# EAGLE board MicroMod-Ethernet-Function-Board-Panel (EAGLE 9.6.2), part 1 of 3
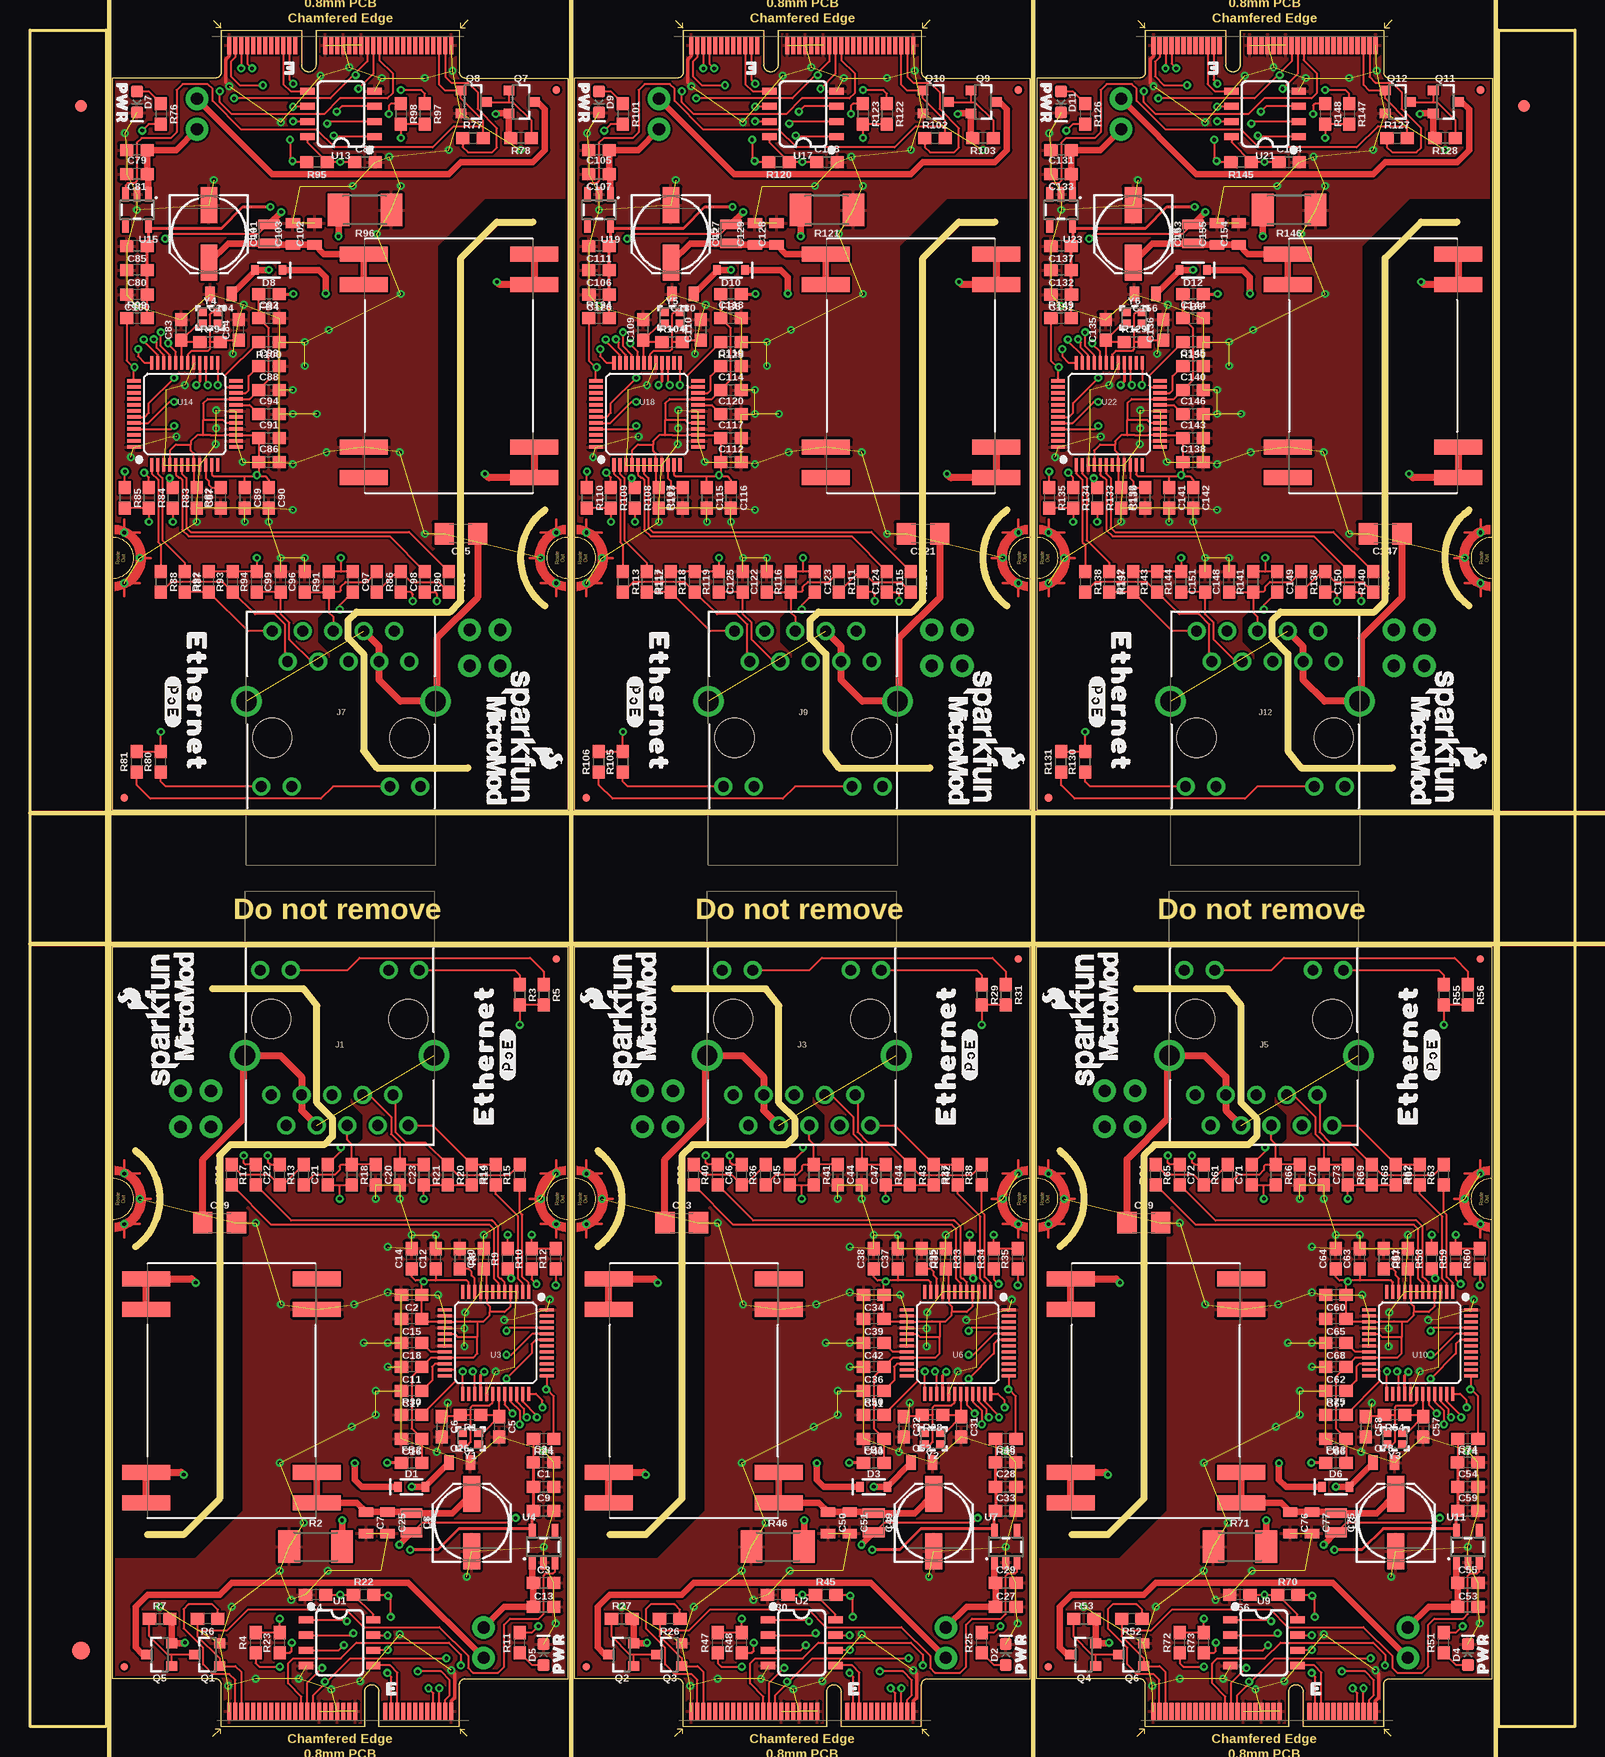
[diagram p0: board, top side]
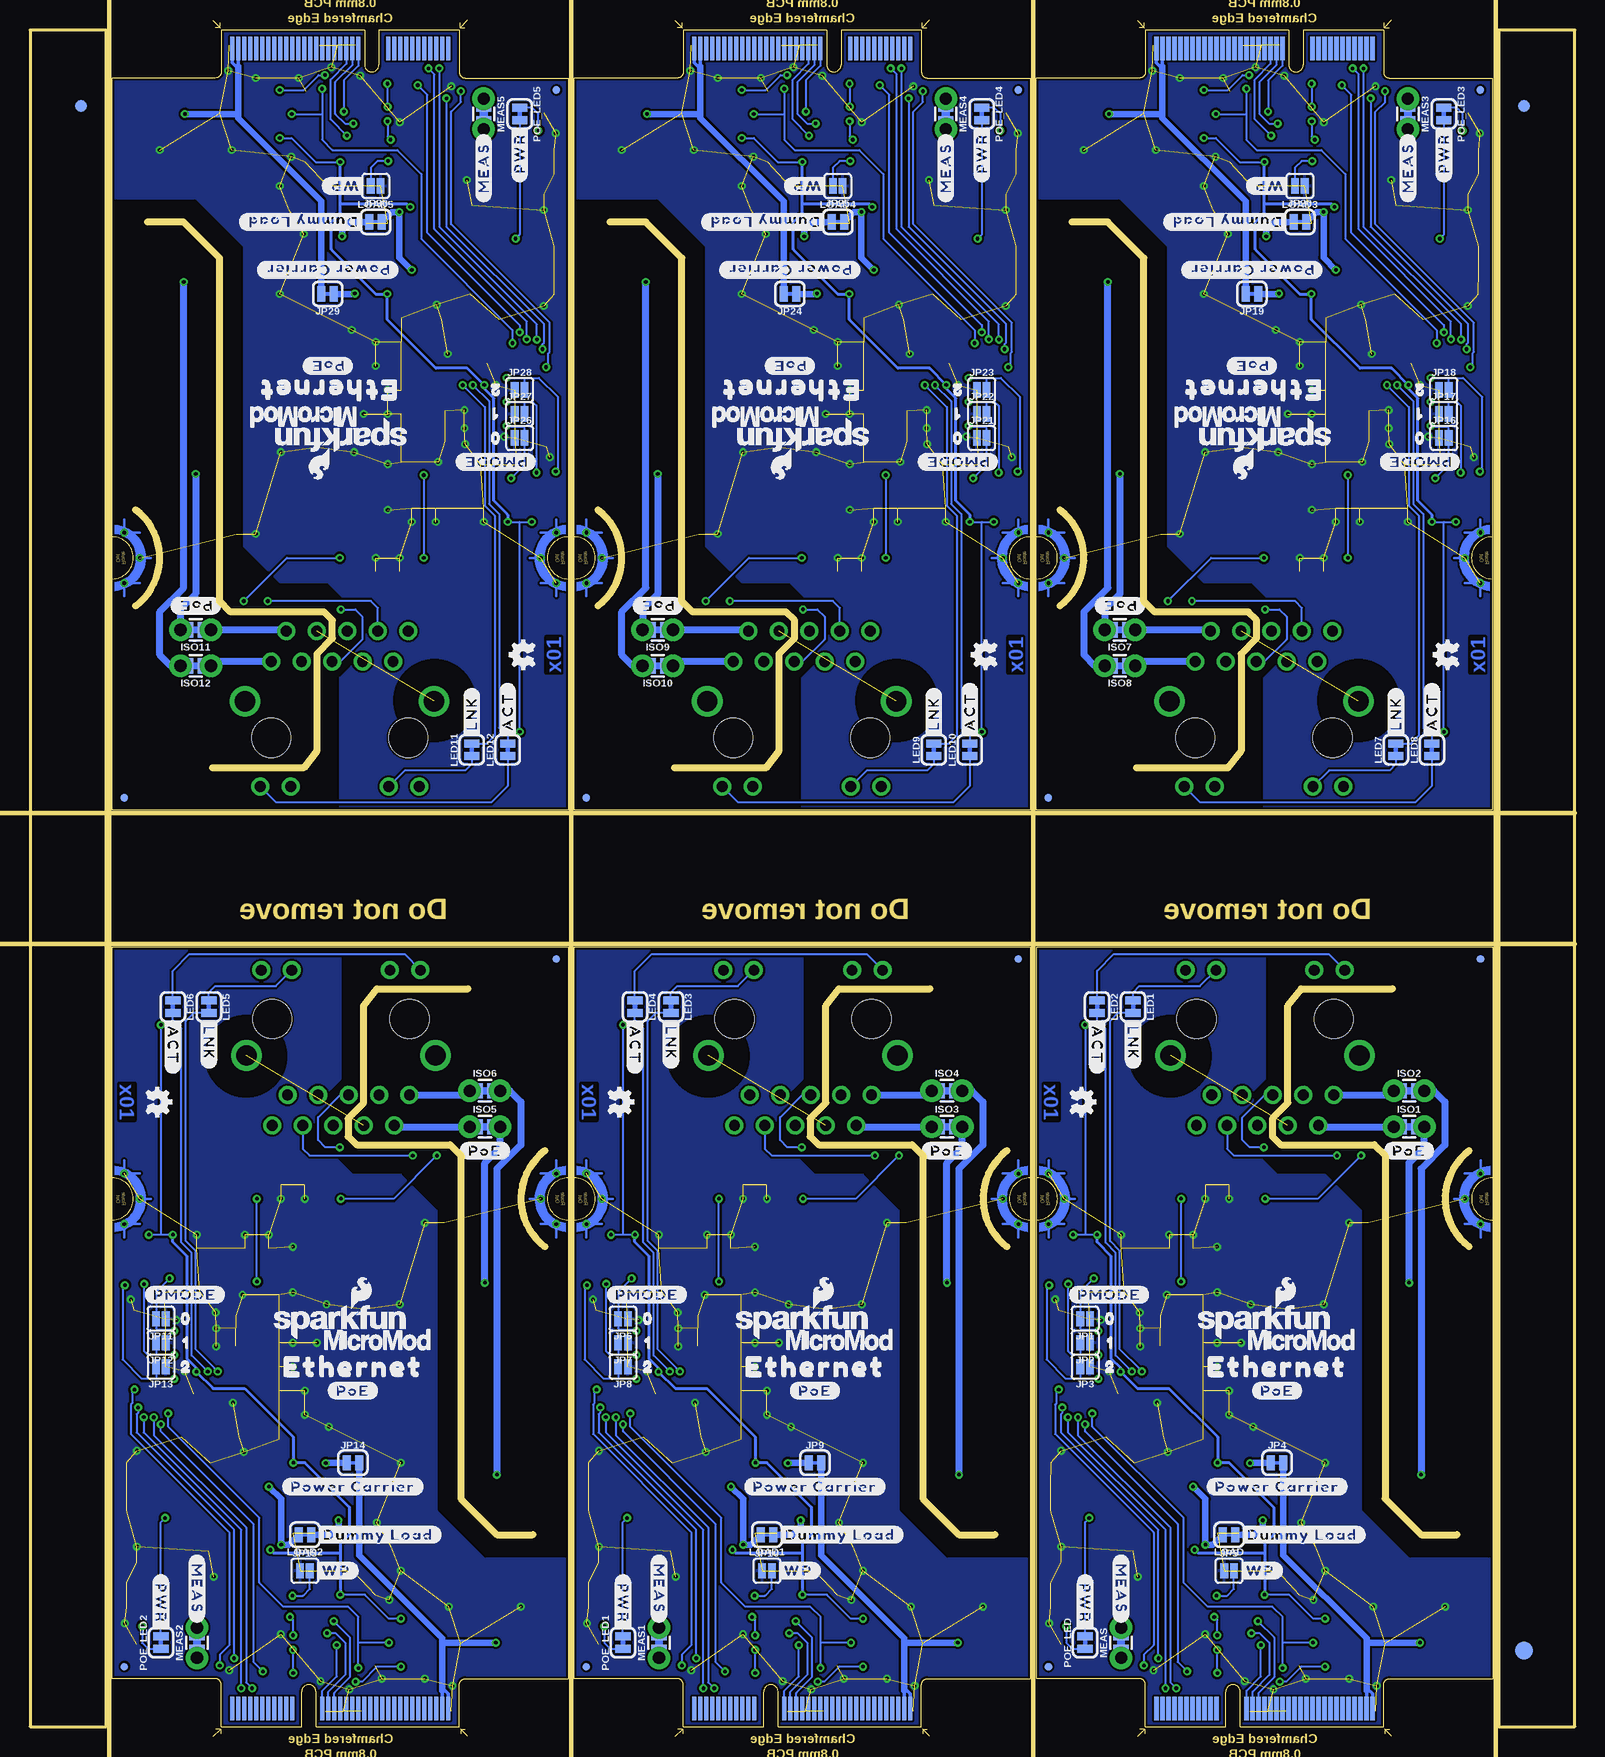
[diagram p1: board, bottom side, seen from below]

Size 128.73 x 141.43 mm. Coordinates in mm from the lower left corner, seen from the top.
Outline: 35.78,0 29.08,0 29.08,2.9 arc180 27.88,2.9 27.88,0 15.93,0 15.93,3.5 arc90 15.46,4 6.86,4 6.86,65 44.86,65 44.86,4 36.26,4 arc90 35.78,3.5 35.78,0
Outline: 74.29,0 67.59,0 67.59,2.9 arc180 66.39,2.9 66.39,0 54.44,0 54.44,3.5 arc90 53.97,4 45.37,4 45.37,65 83.37,65 83.37,4 74.77,4 arc90 74.29,3.5 74.29,0
Outline: 112.8,0 106.1,0 106.1,2.9 arc180 104.9,2.9 104.9,0 92.95,0 92.95,3.5 arc90 92.47,4 83.87,4 83.87,65 121.87,65 121.87,4 113.27,4 arc90 112.8,3.5 112.8,0
Outline: 15.93,141.43 22.63,141.43 22.63,138.53 arc180 23.84,138.53 23.84,141.43 35.78,141.43 35.78,137.93 arc90 36.26,137.43 44.86,137.43 44.86,76.43 6.86,76.43 6.86,137.43 15.46,137.43 arc90 15.93,137.93 15.93,141.43
Outline: 54.44,141.43 61.14,141.43 61.14,138.53 arc180 62.34,138.53 62.34,141.43 74.29,141.43 74.29,137.93 arc90 74.77,137.43 83.37,137.43 83.37,76.43 45.37,76.43 45.37,137.43 53.97,137.43 arc90 54.44,137.93 54.44,141.43
Outline: 92.95,141.43 99.65,141.43 99.65,138.53 arc180 100.85,138.53 100.85,141.43 112.8,141.43 112.8,137.93 arc90 113.28,137.43 121.88,137.43 121.88,76.43 83.88,76.43 83.88,137.43 92.48,137.43 arc90 92.95,137.93 92.95,141.43
Outline: 122.38,141.43 128.73,141.43 128.73,0 122.38,0 122.38,141.43
Outline: 0,141.43 6.35,141.43 6.35,0 0,0 0,141.43
Copper layers (1*16): Top 0.035mm / dielectric 1.5mm / Bottom 0.035mm
Design rules "MicroMod-Ethernet-Function-Board": minimum track width 7mil, minimum drill 12mil, track to track 7mil, track to pad 7mil, pad to pad 7mil, via to via 7mil, smd to smd 7mil, copper to edge 7mil, drill to drill 7mil, minimum pad ring 7mil, minimum via ring 7mil, stop-mask expansion 4mil, vias tented up to drill 25mil, thermal gap 10mil
Net classes: 0 default: width 0 mm, drill 0 mm
tRestrict: area 30.6,52.8 to 36.8,59; area 69.1,52.8 to 75.4,59; area 107.6,52.8 to 113.9,59; area 14.9,82.4 to 21.1,88.7; area 53.4,82.4 to 59.7,88.7; area 91.9,82.4 to 98.2,88.7
bRestrict: area 30.6,52.8 to 36.8,59; area 69.1,52.8 to 75.4,59; area 107.6,52.8 to 113.9,59; area 14.9,82.4 to 21.1,88.7; area 53.4,82.4 to 59.7,88.7; area 91.9,82.4 to 98.2,88.7
Milling: 78 lines

## Footprints (pad centres in the part's own frame; a part is rotated, then mirrored left to right if it is on the bottom)
0603 = smd 1.1 x 1: 1 -0.85,0; 2 0.85,0
0805 = smd 0.8 x 1.2: 1 -0.9,0; 2 0.9,0
PANASONIC_D = smd 3 x 1.4: + 2.4,0; - -2.4,0
1206 = smd 1.6 x 1.8: 1 -1.4,0; 2 1.4,0
SOD-323 = smd 0.63 x 0.83: A 1.15,0; C -1.15,0
LED-0603 = smd 1 x 1: A -0.877,0; C 0.877,0
FIDUCIAL-1X2 = smd 1 x 1: 1 0,0
FIDUCIAL-1.5X3 = smd 1.5 x 1.5: 1 0,0
FIDUCIAL-MICRO = smd 0.635 x 0.635: 1 0,0
COMBO-JUMPER_2_NC_TRACE = smd 0.635 x 1.27: 1 -0.508,0; 2 0.508,0 | drill 1.016 pad 1.88: 3 -1.27,0; 4 1.27,0
MAGJACK-STR_LED = drill 0.9 pad 1.5: 1 -5.715,8.89; 2 -4.445,6.35; 3 -3.175,8.89; 4 -1.905,6.35; 5 -0.635,8.89; 6 0.635,6.35; 7 1.905,8.89; 8 3.175,6.35; 9 4.445,8.89; 10 5.715,6.35; 11 -6.63,-4.06; 12 -4.09,-4.06; 13 4.09,-4.06; 14 6.63,-4.06 | drill 1.7 pad 2.4: S1 -7.875,3.05; S2 7.875,3.05 | hole 3.25: -5.715,0; 5.715,0
M.2-CARD-E-22_FUNCTION_STANDARD = smd 0.35 x 1.45: 1 9.25,1.275; 3 8.75,1.275; 5 8.25,1.275; 7 7.75,1.275; 9 7.25,1.275; 11 6.75,1.275; 13 6.25,1.275; 15 5.75,1.275; 17 5.25,1.275; 19 4.75,1.275; 21 4.25,1.275; 23 3.75,1.275; 33 1.25,1.275; 35 0.75,1.275; 37 0.25,1.275; 39 -0.25,1.275; 41 -0.75,1.275; 43 -1.25,1.275; 45 -1.75,1.275; 47 -2.25,1.275; 49 -2.75,1.275; 51 -3.25,1.275; 53 -3.75,1.275; 55 -4.25,1.275; 57 -4.75,1.275; 59 -5.25,1.275; 61 -5.75,1.275; 63 -6.25,1.275; 65 -6.75,1.275; 67 -7.25,1.275; 69 -7.75,1.275; 71 -8.25,1.275; 73 -8.75,1.275; 75 -9.25,1.275 | smd 0.35 x 1.95 bottom: 2 9,1.525; 4 8.5,1.525; 6 8,1.525; 8 7.5,1.525; 10 7,1.525; 12 6.5,1.525; 14 6,1.525; 16 5.5,1.525; 18 5,1.525; 20 4.5,1.525; 22 4,1.525; 32 1.5,1.525; 34 1,1.525; 36 0.5,1.525; 38 0,1.525; 40 -0.5,1.525; 42 -1,1.525; 44 -1.5,1.525; 46 -2,1.525; 48 -2.5,1.525; 50 -3,1.525; 52 -3.5,1.525; 54 -4,1.525; 56 -4.5,1.525; 58 -5,1.525; 60 -5.5,1.525; 62 -6,1.525; 64 -6.5,1.525; 66 -7,1.525; 68 -7.5,1.525; 70 -8,1.525; 72 -8.5,1.525; 74 -9,1.525 | drill 0.305 pad 0.61: GND1 -18,41.9; GND2 -16.7,44; GND3 -18,46.1; GND4 18,41.9; GND5 16.7,44; GND6 18,46.1
SMT-JUMPER_2_NO_SILK = smd 0.635 x 1.27: 1 -0.406,0; 2 0.406,0
SMT-JUMPER_2_NC_TRACE_SILK = smd 0.66 x 1.27: 1 -0.521,0; 2 0.521,0
0805-WIDE = smd 0.8 x 1.8: 1 -0.8,0; 2 0.8,0
SOT23-3 = smd 0.8 x 0.9: 1 -0.95,-1; 2 0.95,-1; 3 0,1.1
2010 = smd 1.8 x 2.7: 1 -2.2,0; 2 2.2,0
SO08 = smd 0.6 x 1.2: 1 -1.905,-2.8; 2 -0.635,-2.8; 3 0.635,-2.8; 4 1.905,-2.8; 5 1.905,2.8; 6 0.635,2.8; 7 -0.635,2.8; 8 -1.905,2.8
LQFP-48 = smd 0.254 x 1.143: 1 -2.75,-4.25; 2 -2.25,-4.25; 3 -1.75,-4.25; 4 -1.25,-4.25; 5 -0.75,-4.25; 6 -0.25,-4.25; 7 0.25,-4.25; 8 0.75,-4.25; 9 1.25,-4.25; 10 1.75,-4.25; 11 2.25,-4.25; 12 2.75,-4.25; 25 2.75,4.25; 26 2.25,4.25; 27 1.75,4.25; 28 1.25,4.25; 29 0.75,4.25; 30 0.25,4.25; 31 -0.25,4.25; 32 -0.75,4.25; 33 -1.25,4.25; 34 -1.75,4.25; 35 -2.25,4.25; 36 -2.75,4.25 | smd 1.143 x 0.254: 13 4.25,-2.75; 14 4.25,-2.25; 15 4.25,-1.75; 16 4.25,-1.25; 17 4.25,-0.75; 18 4.25,-0.25; 19 4.25,0.25; 20 4.25,0.75; 21 4.25,1.25; 22 4.25,1.75; 23 4.25,2.25; 24 4.25,2.75; 37 -4.25,2.75; 38 -4.25,2.25; 39 -4.25,1.75; 40 -4.25,1.25; 41 -4.25,0.75; 42 -4.25,0.25; 43 -4.25,-0.25; 44 -4.25,-0.75; 45 -4.25,-1.25; 46 -4.25,-1.75; 47 -4.25,-2.25; 48 -4.25,-2.75
SOT23-5 = smd 0.55 x 1.2: 1 -0.95,-1.3; 2 0,-1.3; 3 0.95,-1.3; 4 0.95,1.3; 5 -0.95,1.3
DP990X = smd 1.25 x 4: 1 -9.33,-7.1; 2 -6.79,-7.1; 3 6.79,-7.1; 4 9.33,-7.1; 5 9.33,7.1; 6 6.79,7.1; 7 -6.79,7.1; 8 -9.33,7.1
CRYSTAL-SMD-2.0X1.6MM = smd 0.75 x 0.7: 1 -0.675,-0.5; 2 0.675,-0.5; 3 0.675,0.5; 4 -0.675,0.5

## Placement (x,y rotation side)
C1  0.1uF  [0603]  42.81,20 0 top
C2  0.1uF  [0603]  31.81,36 180 top
C3  0.1uF  [0603]  42.81,12 0 top
C4  0.1uF  [0603]  23.81,11 180 top
C5  10pF  [0603]  39.11,25 270 top
C6  10pF  [0603]  34.31,25 270 top
C7  10uF  [0805]  28.01,17 270 top
C8  100uF  [PANASONIC_D]  36.81,17 90 top
C9  10uF  [0603]  42.81,18 0 top
C10  0.1uF  [0603]  37.81,39 90 top
C11  0.1uF  [0603]  31.81,30 180 top
C12  0.1uF  [0603]  33.81,39 90 top
C13  1.0uF  [0603]  42.81,10 0 top
C14  0.1uF  [0603]  31.81,39 90 top
C15  0.1uF  [0603]  31.81,34 180 top
C16  10uF  [0603]  31.81,24 180 top
C17  10nF  [0603]  31.81,28 180 top
C18  4.7uF  [0603]  31.81,32 180 top
C19  1nF  [1206]  15.81,42 0 top
C20  10nF  [0603]  28.81,46 270 top
C21  6.8nF  [0603]  24.81,46 90 top
C22  6.8nF  [0603]  20.81,46 90 top
C23  22nF  [0603]  30.81,46 270 top
C24  1.0uF  [0603]  42.8,22.05 0 top
C25  10uF  [0805]  29.81,17 270 top
C26  10uF  [0805]  35.81,22 0 top
C27  1.0uF  [0603]  81.32,10 0 top
C28  0.1uF  [0603]  81.32,20 0 top
C29  0.1uF  [0603]  81.32,12 0 top
C30  0.1uF  [0603]  62.32,11 180 top
C31  10pF  [0603]  77.62,25 270 top
C32  10pF  [0603]  72.82,25 270 top
C33  10uF  [0603]  81.32,18 0 top
C34  0.1uF  [0603]  70.32,36 180 top
C35  0.1uF  [0603]  76.32,39 90 top
C36  0.1uF  [0603]  70.32,30 180 top
C37  0.1uF  [0603]  72.32,39 90 top
C38  0.1uF  [0603]  70.32,39 90 top
C39  0.1uF  [0603]  70.32,34 180 top
C40  10uF  [0603]  70.32,24 180 top
C41  10nF  [0603]  70.32,28 180 top
C42  4.7uF  [0603]  70.32,32 180 top
C43  1nF  [1206]  54.32,42 0 top
C44  10nF  [0603]  67.32,46 270 top
C45  6.8nF  [0603]  63.32,46 90 top
C46  6.8nF  [0603]  59.32,46 90 top
C47  22nF  [0603]  69.32,46 270 top
C48  1.0uF  [0603]  81.31,22.05 0 top
C49  100uF  [PANASONIC_D]  75.32,17 90 top
C50  10uF  [0805]  66.52,17 270 top
C51  10uF  [0805]  68.32,17 270 top
C52  10uF  [0805]  74.32,22 0 top
C53  1.0uF  [0603]  119.82,10 0 top
C54  0.1uF  [0603]  119.82,20 0 top
C55  0.1uF  [0603]  119.82,12 0 top
C56  0.1uF  [0603]  100.82,11 180 top
C57  10pF  [0603]  116.12,25 270 top
C58  10pF  [0603]  111.32,25 270 top
C59  10uF  [0603]  119.82,18 0 top
C60  0.1uF  [0603]  108.82,36 180 top
C61  0.1uF  [0603]  114.82,39 90 top
C62  0.1uF  [0603]  108.82,30 180 top
C63  0.1uF  [0603]  110.82,39 90 top
C64  0.1uF  [0603]  108.82,39 90 top
C65  0.1uF  [0603]  108.82,34 180 top
C66  10uF  [0603]  108.82,24 180 top
C67  10nF  [0603]  108.82,28 180 top
C68  4.7uF  [0603]  108.82,32 180 top
C69  1nF  [1206]  92.82,42 0 top
C70  10nF  [0603]  105.82,46 270 top
C71  6.8nF  [0603]  101.82,46 90 top
C72  6.8nF  [0603]  97.82,46 90 top
C73  22nF  [0603]  107.82,46 270 top
C74  1.0uF  [0603]  119.81,22.05 0 top
C75  100uF  [PANASONIC_D]  113.82,17 90 top
C76  10uF  [0805]  105.02,17 270 top
C77  10uF  [0805]  106.82,17 270 top
C78  10uF  [0805]  112.82,22 0 top
C79  1.0uF  [0603]  8.91,131.43 180 top
C80  0.1uF  [0603]  8.91,121.43 180 top
C81  0.1uF  [0603]  8.91,129.43 180 top
C82  0.1uF  [0603]  27.91,130.43 0 top
C83  10pF  [0603]  12.61,116.43 90 top
C84  10pF  [0603]  17.41,116.43 90 top
C85  10uF  [0603]  8.91,123.43 180 top
C86  0.1uF  [0603]  19.91,105.43 0 top
C87  0.1uF  [0603]  13.91,102.43 270 top
C88  0.1uF  [0603]  19.91,111.43 0 top
C89  0.1uF  [0603]  17.91,102.43 270 top
C90  0.1uF  [0603]  19.91,102.43 270 top
C91  0.1uF  [0603]  19.91,107.43 0 top
C92  10uF  [0603]  19.91,117.43 0 top
C93  10nF  [0603]  19.91,113.43 0 top
C94  4.7uF  [0603]  19.91,109.43 0 top
C95  1nF  [1206]  35.91,99.43 180 top
C96  10nF  [0603]  22.91,95.43 90 top
C97  6.8nF  [0603]  26.91,95.43 270 top
C98  6.8nF  [0603]  30.91,95.43 270 top
C99  22nF  [0603]  20.91,95.43 90 top
C100  1.0uF  [0603]  8.92,119.38 180 top
C101  100uF  [PANASONIC_D]  14.91,124.43 270 top
C102  10uF  [0805]  23.71,124.43 90 top
C103  10uF  [0805]  21.91,124.43 90 top
C104  10uF  [0805]  15.91,119.43 180 top
C105  1.0uF  [0603]  47.42,131.43 180 top
C106  0.1uF  [0603]  47.42,121.43 180 top
C107  0.1uF  [0603]  47.42,129.43 180 top
C108  0.1uF  [0603]  66.42,130.43 0 top
C109  10pF  [0603]  51.12,116.43 90 top
C110  10pF  [0603]  55.92,116.43 90 top
C111  10uF  [0603]  47.42,123.43 180 top
C112  0.1uF  [0603]  58.42,105.43 0 top
C113  0.1uF  [0603]  52.42,102.43 270 top
C114  0.1uF  [0603]  58.42,111.43 0 top
C115  0.1uF  [0603]  56.42,102.43 270 top
C116  0.1uF  [0603]  58.42,102.43 270 top
C117  0.1uF  [0603]  58.42,107.43 0 top
C118  10uF  [0603]  58.42,117.43 0 top
C119  10nF  [0603]  58.42,113.43 0 top
C120  4.7uF  [0603]  58.42,109.43 0 top
C121  1nF  [1206]  74.42,99.43 180 top
C122  10nF  [0603]  61.42,95.43 90 top
C123  6.8nF  [0603]  65.42,95.43 270 top
C124  6.8nF  [0603]  69.42,95.43 270 top
C125  22nF  [0603]  59.42,95.43 90 top
C126  1.0uF  [0603]  47.43,119.38 180 top
C127  100uF  [PANASONIC_D]  53.42,124.43 270 top
C128  10uF  [0805]  62.22,124.43 90 top
C129  10uF  [0805]  60.42,124.43 90 top
C130  10uF  [0805]  54.42,119.43 180 top
C131  1.0uF  [0603]  85.93,131.43 180 top
C132  0.1uF  [0603]  85.93,121.43 180 top
C133  0.1uF  [0603]  85.93,129.43 180 top
C134  0.1uF  [0603]  104.93,130.43 0 top
C135  10pF  [0603]  89.63,116.43 90 top
C136  10pF  [0603]  94.43,116.43 90 top
C137  10uF  [0603]  85.93,123.43 180 top
C138  0.1uF  [0603]  96.93,105.43 0 top
C139  0.1uF  [0603]  90.93,102.43 270 top
C140  0.1uF  [0603]  96.93,111.43 0 top
C141  0.1uF  [0603]  94.93,102.43 270 top
C142  0.1uF  [0603]  96.93,102.43 270 top
C143  0.1uF  [0603]  96.93,107.43 0 top
C144  10uF  [0603]  96.93,117.43 0 top
C145  10nF  [0603]  96.93,113.43 0 top
C146  4.7uF  [0603]  96.93,109.43 0 top
C147  1nF  [1206]  112.93,99.43 180 top
C148  10nF  [0603]  99.93,95.43 90 top
C149  6.8nF  [0603]  103.93,95.43 270 top
C150  6.8nF  [0603]  107.93,95.43 270 top
C151  22nF  [0603]  97.93,95.43 90 top
C152  1.0uF  [0603]  85.94,119.38 180 top
C153  100uF  [PANASONIC_D]  91.93,124.43 270 top
C154  10uF  [0805]  100.73,124.43 90 top
C155  10uF  [0805]  98.93,124.43 90 top
C156  10uF  [0805]  92.93,119.43 180 top
D1  3A/10V/280mV  [SOD-323]  31.81,20 0 top
D2  RED  [LED-0603]  81.32,6 90 top
D3  3A/10V/280mV  [SOD-323]  70.32,20 0 top
D4  RED  [LED-0603]  119.82,6 90 top
D5  RED  [LED-0603]  42.81,6 90 top
D6  3A/10V/280mV  [SOD-323]  108.82,20 0 top
D7  RED  [LED-0603]  8.91,135.43 270 top
D8  3A/10V/280mV  [SOD-323]  19.91,121.43 180 top
D9  RED  [LED-0603]  47.42,135.43 270 top
D10  3A/10V/280mV  [SOD-323]  58.42,121.43 180 top
D11  RED  [LED-0603]  85.93,135.43 270 top
D12  3A/10V/280mV  [SOD-323]  96.93,121.43 180 top
E$1  [FIDUCIAL-1X2]  4.23,135.08 0 top
E$2  [FIDUCIAL-1X2]  4.23,135.08 0 bottom
E$3  [FIDUCIAL-1X2]  124.5,135.08 0 top
E$4  [FIDUCIAL-1X2]  124.5,135.08 0 bottom
E$5  [FIDUCIAL-1.5X3]  4.23,6.35 0 top
E$6  [FIDUCIAL-1.5X3]  4.23,6.35 0 bottom
FB1  470Ω  [0603]  70.32,22 0 top
FB2  470Ω  [0603]  31.81,22 0 top
FB3  470Ω  [0603]  108.82,22 0 top
FB4  470Ω  [0603]  19.91,119.43 180 top
FB5  470Ω  [0603]  58.42,119.43 180 top
FB6  470Ω  [0603]  96.93,119.43 180 top
FD1  FIDUCIALUFIDUCIAL  [FIDUCIAL-MICRO]  7.86,5 90 top
FD2  FIDUCIALUFIDUCIAL  [FIDUCIAL-MICRO]  43.86,64 90 top
FD3  FIDUCIALUFIDUCIAL  [FIDUCIAL-MICRO]  43.86,5 270 bottom
FD4  FIDUCIALUFIDUCIAL  [FIDUCIAL-MICRO]  7.86,64 270 bottom
FD5  FIDUCIALUFIDUCIAL  [FIDUCIAL-MICRO]  46.37,5 90 top
FD6  FIDUCIALUFIDUCIAL  [FIDUCIAL-MICRO]  82.37,64 90 top
FD7  FIDUCIALUFIDUCIAL  [FIDUCIAL-MICRO]  82.37,5 270 bottom
FD8  FIDUCIALUFIDUCIAL  [FIDUCIAL-MICRO]  46.37,64 270 bottom
FD9  FIDUCIALUFIDUCIAL  [FIDUCIAL-MICRO]  84.87,5 90 top
FD10  FIDUCIALUFIDUCIAL  [FIDUCIAL-MICRO]  120.87,64 90 top
FD11  FIDUCIALUFIDUCIAL  [FIDUCIAL-MICRO]  120.87,5 270 bottom
FD12  FIDUCIALUFIDUCIAL  [FIDUCIAL-MICRO]  84.87,64 270 bottom
FD13  FIDUCIALUFIDUCIAL  [FIDUCIAL-MICRO]  43.86,136.43 270 top
FD14  FIDUCIALUFIDUCIAL  [FIDUCIAL-MICRO]  7.86,77.43 270 top
FD15  FIDUCIALUFIDUCIAL  [FIDUCIAL-MICRO]  7.86,136.43 90 bottom
FD16  FIDUCIALUFIDUCIAL  [FIDUCIAL-MICRO]  43.86,77.43 90 bottom
FD17  FIDUCIALUFIDUCIAL  [FIDUCIAL-MICRO]  82.37,136.43 270 top
FD18  FIDUCIALUFIDUCIAL  [FIDUCIAL-MICRO]  46.37,77.43 270 top
FD19  FIDUCIALUFIDUCIAL  [FIDUCIAL-MICRO]  46.37,136.43 90 bottom
FD20  FIDUCIALUFIDUCIAL  [FIDUCIAL-MICRO]  82.37,77.43 90 bottom
FD21  FIDUCIALUFIDUCIAL  [FIDUCIAL-MICRO]  120.88,136.43 270 top
FD22  FIDUCIALUFIDUCIAL  [FIDUCIAL-MICRO]  84.88,77.43 270 top
FD23  FIDUCIALUFIDUCIAL  [FIDUCIAL-MICRO]  84.88,136.43 90 bottom
FD24  FIDUCIALUFIDUCIAL  [FIDUCIAL-MICRO]  120.88,77.43 90 bottom
ISO1  [COMBO-JUMPER_2_NC_TRACE]  13.81,50 0 bottom
ISO2  [COMBO-JUMPER_2_NC_TRACE]  13.81,53 0 bottom
ISO3  [COMBO-JUMPER_2_NC_TRACE]  52.32,50 0 bottom
ISO4  [COMBO-JUMPER_2_NC_TRACE]  52.32,53 0 bottom
ISO5  [COMBO-JUMPER_2_NC_TRACE]  90.82,50 0 bottom
ISO6  [COMBO-JUMPER_2_NC_TRACE]  90.82,53 0 bottom
ISO7  [COMBO-JUMPER_2_NC_TRACE]  37.91,91.43 180 bottom
ISO8  [COMBO-JUMPER_2_NC_TRACE]  37.91,88.43 180 bottom
ISO9  [COMBO-JUMPER_2_NC_TRACE]  76.42,91.43 180 bottom
ISO10  [COMBO-JUMPER_2_NC_TRACE]  76.42,88.43 180 bottom
ISO11  [COMBO-JUMPER_2_NC_TRACE]  114.93,91.43 180 bottom
ISO12  [COMBO-JUMPER_2_NC_TRACE]  114.93,88.43 180 bottom
J1  MAGJACK_SYM  [MAGJACK-STR_LED]  25.81,59 180 top
J2  MICROMOD_STANDARD  [M.2-CARD-E-22_FUNCTION_STANDARD]  64.37,0 0 top
J3  MAGJACK_SYM  [MAGJACK-STR_LED]  64.32,59 180 top
J4  MICROMOD_STANDARD  [M.2-CARD-E-22_FUNCTION_STANDARD]  102.87,0 0 top
J5  MAGJACK_SYM  [MAGJACK-STR_LED]  102.82,59 180 top
J6  MICROMOD_STANDARD  [M.2-CARD-E-22_FUNCTION_STANDARD]  25.86,141.43 180 top
J7  MAGJACK_SYM  [MAGJACK-STR_LED]  25.91,82.43 0 top
J8  MICROMOD_STANDARD  [M.2-CARD-E-22_FUNCTION_STANDARD]  64.37,141.43 180 top
J9  MAGJACK_SYM  [MAGJACK-STR_LED]  64.42,82.43 0 top
J10  MICROMOD_STANDARD  [M.2-CARD-E-22_FUNCTION_STANDARD]  102.88,141.43 180 top
J11  MICROMOD_STANDARD  [M.2-CARD-E-22_FUNCTION_STANDARD]  25.86,0 0 top
J12  MAGJACK_SYM  [MAGJACK-STR_LED]  102.93,82.43 0 top
JP1  [SMT-JUMPER_2_NO_SILK]  40.81,34 180 bottom
JP2  [SMT-JUMPER_2_NO_SILK]  40.81,32 180 bottom
JP3  [SMT-JUMPER_2_NO_SILK]  40.81,30 180 bottom
JP4  PoE System  [SMT-JUMPER_2_NC_TRACE_SILK]  24.81,22 0 bottom
JP5  JUMPER-SMT_2_NO_SILK  [SMT-JUMPER_2_NO_SILK]  28.81,13 0 bottom
JP6  [SMT-JUMPER_2_NO_SILK]  79.32,34 180 bottom
JP7  [SMT-JUMPER_2_NO_SILK]  79.32,32 180 bottom
JP8  [SMT-JUMPER_2_NO_SILK]  79.32,30 180 bottom
JP9  PoE System  [SMT-JUMPER_2_NC_TRACE_SILK]  63.32,22 0 bottom
JP10  JUMPER-SMT_2_NO_SILK  [SMT-JUMPER_2_NO_SILK]  67.32,13 0 bottom
JP11  [SMT-JUMPER_2_NO_SILK]  117.82,34 180 bottom
JP12  [SMT-JUMPER_2_NO_SILK]  117.82,32 180 bottom
JP13  [SMT-JUMPER_2_NO_SILK]  117.82,30 180 bottom
JP14  PoE System  [SMT-JUMPER_2_NC_TRACE_SILK]  101.82,22 0 bottom
JP15  JUMPER-SMT_2_NO_SILK  [SMT-JUMPER_2_NO_SILK]  105.82,13 0 bottom
JP16  [SMT-JUMPER_2_NO_SILK]  10.91,107.43 0 bottom
JP17  [SMT-JUMPER_2_NO_SILK]  10.91,109.43 0 bottom
JP18  [SMT-JUMPER_2_NO_SILK]  10.91,111.43 0 bottom
JP19  PoE System  [SMT-JUMPER_2_NC_TRACE_SILK]  26.91,119.43 180 bottom
JP20  JUMPER-SMT_2_NO_SILK  [SMT-JUMPER_2_NO_SILK]  22.91,128.43 180 bottom
JP21  [SMT-JUMPER_2_NO_SILK]  49.42,107.43 0 bottom
JP22  [SMT-JUMPER_2_NO_SILK]  49.42,109.43 0 bottom
JP23  [SMT-JUMPER_2_NO_SILK]  49.42,111.43 0 bottom
JP24  PoE System  [SMT-JUMPER_2_NC_TRACE_SILK]  65.42,119.43 180 bottom
JP25  JUMPER-SMT_2_NO_SILK  [SMT-JUMPER_2_NO_SILK]  61.42,128.43 180 bottom
JP26  [SMT-JUMPER_2_NO_SILK]  87.93,107.43 0 bottom
JP27  [SMT-JUMPER_2_NO_SILK]  87.93,109.43 0 bottom
JP28  [SMT-JUMPER_2_NO_SILK]  87.93,111.43 0 bottom
JP29  PoE System  [SMT-JUMPER_2_NC_TRACE_SILK]  103.93,119.43 180 bottom
JP30  JUMPER-SMT_2_NO_SILK  [SMT-JUMPER_2_NO_SILK]  99.93,128.43 180 bottom
L1  2.2uH  [0805-WIDE]  31.81,17 270 top
L2  2.2uH  [0805-WIDE]  70.32,17 270 top
L3  2.2uH  [0805-WIDE]  108.82,17 270 top
L4  2.2uH  [0805-WIDE]  19.91,124.43 90 top
L5  2.2uH  [0805-WIDE]  58.42,124.43 90 top
L6  2.2uH  [0805-WIDE]  96.93,124.43 90 top
LED1  JUMPER-SMT_2_NC_TRACE_SILK  [SMT-JUMPER_2_NC_TRACE_SILK]  36.81,60 270 bottom
LED2  JUMPER-SMT_2_NC_TRACE_SILK  [SMT-JUMPER_2_NC_TRACE_SILK]  39.81,60 270 bottom
LED3  JUMPER-SMT_2_NC_TRACE_SILK  [SMT-JUMPER_2_NC_TRACE_SILK]  75.32,60 270 bottom
LED4  JUMPER-SMT_2_NC_TRACE_SILK  [SMT-JUMPER_2_NC_TRACE_SILK]  78.32,60 270 bottom
LED5  JUMPER-SMT_2_NC_TRACE_SILK  [SMT-JUMPER_2_NC_TRACE_SILK]  113.82,60 270 bottom
LED6  JUMPER-SMT_2_NC_TRACE_SILK  [SMT-JUMPER_2_NC_TRACE_SILK]  116.82,60 270 bottom
LED7  JUMPER-SMT_2_NC_TRACE_SILK  [SMT-JUMPER_2_NC_TRACE_SILK]  14.91,81.43 90 bottom
LED8  JUMPER-SMT_2_NC_TRACE_SILK  [SMT-JUMPER_2_NC_TRACE_SILK]  11.91,81.43 90 bottom
LED9  JUMPER-SMT_2_NC_TRACE_SILK  [SMT-JUMPER_2_NC_TRACE_SILK]  53.42,81.43 90 bottom
LED10  JUMPER-SMT_2_NC_TRACE_SILK  [SMT-JUMPER_2_NC_TRACE_SILK]  50.42,81.43 90 bottom
LED11  JUMPER-SMT_2_NC_TRACE_SILK  [SMT-JUMPER_2_NC_TRACE_SILK]  91.93,81.43 90 bottom
LED12  JUMPER-SMT_2_NC_TRACE_SILK  [SMT-JUMPER_2_NC_TRACE_SILK]  88.93,81.43 90 bottom
LOAD  [SMT-JUMPER_2_NC_TRACE_SILK]  28.81,16 180 bottom
LOAD1  [SMT-JUMPER_2_NC_TRACE_SILK]  67.32,16 180 bottom
LOAD2  [SMT-JUMPER_2_NC_TRACE_SILK]  105.82,16 180 bottom
LOAD3  [SMT-JUMPER_2_NC_TRACE_SILK]  22.91,125.43 0 bottom
LOAD4  [SMT-JUMPER_2_NC_TRACE_SILK]  61.42,125.43 0 bottom
LOAD5  [SMT-JUMPER_2_NC_TRACE_SILK]  99.93,125.43 0 bottom
LOGO1  SFE_LOGO_NAME_FLAME.1_INCH  [SFE_LOGO_NAME_FLAME_.1]  11,58.97 90 top
LOGO2  SFE_LOGO_NAME_FLAME.1_INCH  [SFE_LOGO_NAME_FLAME_.1]  49.51,58.97 90 top
LOGO3  OSHW-LOGOMINI  [OSHW-LOGO-MINI]  41.1,52.07 270 bottom
LOGO4  SFE_LOGO_NAME_FLAME.1_INCH  [SFE_LOGO_NAME_FLAME_.1]  25.83,33.76 0 bottom
LOGO5  OSHW-LOGOMINI  [OSHW-LOGO-MINI]  79.61,52.07 270 bottom
LOGO6  SFE_LOGO_NAME_FLAME.1_INCH  [SFE_LOGO_NAME_FLAME_.1]  64.34,33.76 0 bottom
LOGO7  SFE_LOGO_NAME_FLAME.1_INCH  [SFE_LOGO_NAME_FLAME_.1]  88.01,58.97 90 top
LOGO8  OSHW-LOGOMINI  [OSHW-LOGO-MINI]  118.11,52.07 270 bottom
LOGO9  SFE_LOGO_NAME_FLAME.1_INCH  [SFE_LOGO_NAME_FLAME_.1]  102.84,33.76 0 bottom
LOGO10  SFE_LOGO_NAME_FLAME.1_INCH  [SFE_LOGO_NAME_FLAME_.1]  40.72,82.46 270 top
LOGO11  OSHW-LOGOMINI  [OSHW-LOGO-MINI]  10.62,89.36 90 bottom
LOGO12  SFE_LOGO_NAME_FLAME.1_INCH  [SFE_LOGO_NAME_FLAME_.1]  25.89,107.67 180 bottom
LOGO13  SFE_LOGO_NAME_FLAME.1_INCH  [SFE_LOGO_NAME_FLAME_.1]  79.23,82.46 270 top
LOGO14  OSHW-LOGOMINI  [OSHW-LOGO-MINI]  49.13,89.36 90 bottom
LOGO15  SFE_LOGO_NAME_FLAME.1_INCH  [SFE_LOGO_NAME_FLAME_.1]  64.4,107.67 180 bottom
LOGO16  SFE_LOGO_NAME_FLAME.1_INCH  [SFE_LOGO_NAME_FLAME_.1]  117.73,82.46 270 top
LOGO17  OSHW-LOGOMINI  [OSHW-LOGO-MINI]  87.64,89.36 90 bottom
LOGO18  SFE_LOGO_NAME_FLAME.1_INCH  [SFE_LOGO_NAME_FLAME_.1]  102.91,107.67 180 bottom
MEAS  [COMBO-JUMPER_2_NC_TRACE]  37.81,7 90 bottom
MEAS1  [COMBO-JUMPER_2_NC_TRACE]  76.32,7 90 bottom
MEAS2  [COMBO-JUMPER_2_NC_TRACE]  114.82,7 90 bottom
MEAS3  [COMBO-JUMPER_2_NC_TRACE]  13.91,134.43 270 bottom
MEAS4  [COMBO-JUMPER_2_NC_TRACE]  52.42,134.43 270 bottom
MEAS5  [COMBO-JUMPER_2_NC_TRACE]  90.93,134.43 270 bottom
POE_LED  [SMT-JUMPER_2_NC_TRACE_SILK]  40.81,7 90 bottom
POE_LED1  [SMT-JUMPER_2_NC_TRACE_SILK]  79.32,7 90 bottom
POE_LED2  [SMT-JUMPER_2_NC_TRACE_SILK]  117.82,7 90 bottom
POE_LED3  [SMT-JUMPER_2_NC_TRACE_SILK]  10.91,134.43 270 bottom
POE_LED4  [SMT-JUMPER_2_NC_TRACE_SILK]  49.42,134.43 270 bottom
POE_LED5  [SMT-JUMPER_2_NC_TRACE_SILK]  87.93,134.43 270 bottom
Q1  220mA/50V/3.5Ω  [SOT23-3]  14.81,6 90 top
Q2  20V/4.2A/52mΩ/1.4W  [SOT23-3]  49.32,6 90 top
Q3  220mA/50V/3.5Ω  [SOT23-3]  53.32,6 90 top
Q4  20V/4.2A/52mΩ/1.4W  [SOT23-3]  87.82,6 90 top
Q5  20V/4.2A/52mΩ/1.4W  [SOT23-3]  10.81,6 90 top
Q6  220mA/50V/3.5Ω  [SOT23-3]  91.82,6 90 top
Q7  20V/4.2A/52mΩ/1.4W  [SOT23-3]  40.91,135.43 270 top
Q8  220mA/50V/3.5Ω  [SOT23-3]  36.91,135.43 270 top
Q9  20V/4.2A/52mΩ/1.4W  [SOT23-3]  79.42,135.43 270 top
Q10  220mA/50V/3.5Ω  [SOT23-3]  75.42,135.43 270 top
Q11  20V/4.2A/52mΩ/1.4W  [SOT23-3]  117.93,135.43 270 top
Q12  220mA/50V/3.5Ω  [SOT23-3]  113.93,135.43 270 top
R1  1M  [0603]  36.71,26 180 top
R2  510  [2010]  23.81,15 0 top
R3  1k  [0603]  40.81,61 270 top
R4  10k  [0603]  18.81,7 90 top
R5  1k  [0603]  42.81,61 270 top
R6  10k  [0603]  14.81,9 180 top
R7  10k  [0603]  10.81,9 0 top
R8  12.4k  [0603]  35.81,39 270 top
R9  10k  [0603]  39.81,39 90 top
R10  10k  [0603]  41.81,39 90 top
R11  1k  [0603]  40.81,7 90 top
R12  10k  [0603]  43.81,39 90 top
R13  49.9  [0603]  22.81,46 90 top
R14  33  [0603]  38.81,46 90 top
R15  33  [0603]  40.81,46 90 top
R16  33  [0603]  16.81,46 90 top
R17  33  [0603]  18.81,46 90 top
R18  49.9  [0603]  26.81,46 270 top
R19  49.9  [0603]  36.81,46 270 top
R20  49.9  [0603]  34.81,46 270 top
R21  10  [0603]  32.81,46 270 top
R22  10k  [0603]  27.81,11 0 top
R23  10k  [0603]  20.81,7 90 top
R24  10k  [0603]  42.81,24 180 top
R25  1k  [0603]  79.32,7 90 top
R26  10k  [0603]  53.32,9 180 top
R27  10k  [0603]  49.32,9 0 top
R28  1M  [0603]  75.22,26 180 top
R29  1k  [0603]  79.32,61 270 top
R30  10k  [0603]  31.81,26 0 top
R31  1k  [0603]  81.32,61 270 top
R32  12.4k  [0603]  74.32,39 270 top
R33  10k  [0603]  78.32,39 90 top
R34  10k  [0603]  80.32,39 90 top
R35  10k  [0603]  82.32,39 90 top
R36  49.9  [0603]  61.32,46 90 top
R37  33  [0603]  77.32,46 90 top
R38  33  [0603]  79.32,46 90 top
R39  33  [0603]  55.32,46 90 top
R40  33  [0603]  57.32,46 90 top
R41  49.9  [0603]  65.32,46 270 top
R42  49.9  [0603]  75.32,46 270 top
R43  49.9  [0603]  73.32,46 270 top
R44  10  [0603]  71.32,46 270 top
R45  10k  [0603]  66.32,11 0 top
R46  510  [2010]  62.32,15 0 top
R47  10k  [0603]  57.32,7 90 top
R48  10k  [0603]  59.32,7 90 top
R49  10k  [0603]  81.32,24 180 top
R50  10k  [0603]  70.32,26 0 top
R51  1k  [0603]  117.82,7 90 top
R52  10k  [0603]  91.82,9 180 top
R53  10k  [0603]  87.82,9 0 top
R54  1M  [0603]  113.72,26 180 top
R55  1k  [0603]  117.82,61 270 top
R56  1k  [0603]  119.82,61 270 top
R57  12.4k  [0603]  112.82,39 270 top
R58  10k  [0603]  116.82,39 90 top
R59  10k  [0603]  118.82,39 90 top
R60  10k  [0603]  120.82,39 90 top
R61  49.9  [0603]  99.82,46 90 top
R62  33  [0603]  115.82,46 90 top
R63  33  [0603]  117.82,46 90 top
R64  33  [0603]  93.82,46 90 top
R65  33  [0603]  95.82,46 90 top
R66  49.9  [0603]  103.82,46 270 top
R67  49.9  [0603]  113.82,46 270 top
R68  49.9  [0603]  111.82,46 270 top
R69  10  [0603]  109.82,46 270 top
R70  10k  [0603]  104.82,11 0 top
R71  510  [2010]  100.82,15 0 top
R72  10k  [0603]  95.82,7 90 top
R73  10k  [0603]  97.82,7 90 top
R74  10k  [0603]  119.82,24 180 top
R75  10k  [0603]  108.82,26 0 top
R76  1k  [0603]  10.91,134.43 270 top
R77  10k  [0603]  36.91,132.43 0 top
R78  10k  [0603]  40.91,132.43 180 top
R79  1M  [0603]  15.01,115.43 0 top
R80  1k  [0603]  10.91,80.43 90 top
R81  1k  [0603]  8.91,80.43 90 top
R82  12.4k  [0603]  15.91,102.43 90 top
R83  10k  [0603]  11.91,102.43 270 top
R84  10k  [0603]  9.91,102.43 270 top
R85  10k  [0603]  7.91,102.43 270 top
R86  49.9  [0603]  28.91,95.43 270 top
R87  33  [0603]  12.91,95.43 270 top
R88  33  [0603]  10.91,95.43 270 top
R89  33  [0603]  34.91,95.43 270 top
R90  33  [0603]  32.91,95.43 270 top
R91  49.9  [0603]  24.91,95.43 90 top
R92  49.9  [0603]  14.91,95.43 90 top
R93  49.9  [0603]  16.91,95.43 90 top
R94  10  [0603]  18.91,95.43 90 top
R95  10k  [0603]  23.91,130.43 180 top
R96  510  [2010]  27.91,126.43 180 top
R97  10k  [0603]  32.91,134.43 270 top
R98  10k  [0603]  30.91,134.43 270 top
R99  10k  [0603]  8.91,117.43 0 top
R100  10k  [0603]  19.91,115.43 180 top
R101  1k  [0603]  49.42,134.43 270 top
R102  10k  [0603]  75.42,132.43 0 top
R103  10k  [0603]  79.42,132.43 180 top
R104  1M  [0603]  53.52,115.43 0 top
R105  1k  [0603]  49.42,80.43 90 top
R106  1k  [0603]  47.42,80.43 90 top
R107  12.4k  [0603]  54.42,102.43 90 top
R108  10k  [0603]  50.42,102.43 270 top
R109  10k  [0603]  48.42,102.43 270 top
R110  10k  [0603]  46.42,102.43 270 top
R111  49.9  [0603]  67.42,95.43 270 top
R112  33  [0603]  51.42,95.43 270 top
R113  33  [0603]  49.42,95.43 270 top
R114  33  [0603]  73.42,95.43 270 top
R115  33  [0603]  71.42,95.43 270 top
R116  49.9  [0603]  63.42,95.43 90 top
R117  49.9  [0603]  53.42,95.43 90 top
R118  49.9  [0603]  55.42,95.43 90 top
R119  10  [0603]  57.42,95.43 90 top
R120  10k  [0603]  62.42,130.43 180 top
R121  510  [2010]  66.42,126.43 180 top
R122  10k  [0603]  71.42,134.43 270 top
R123  10k  [0603]  69.42,134.43 270 top
R124  10k  [0603]  47.42,117.43 0 top
R125  10k  [0603]  58.42,115.43 180 top
R126  1k  [0603]  87.93,134.43 270 top
R127  10k  [0603]  113.93,132.43 0 top
R128  10k  [0603]  117.93,132.43 180 top
R129  1M  [0603]  92.03,115.43 0 top
R130  1k  [0603]  87.93,80.43 90 top
R131  1k  [0603]  85.93,80.43 90 top
R132  12.4k  [0603]  92.93,102.43 90 top
R133  10k  [0603]  88.93,102.43 270 top
R134  10k  [0603]  86.93,102.43 270 top
R135  10k  [0603]  84.93,102.43 270 top
R136  49.9  [0603]  105.93,95.43 270 top
R137  33  [0603]  89.93,95.43 270 top
R138  33  [0603]  87.93,95.43 270 top
R139  33  [0603]  111.93,95.43 270 top
R140  33  [0603]  109.93,95.43 270 top
R141  49.9  [0603]  101.93,95.43 90 top
R142  49.9  [0603]  91.93,95.43 90 top
R143  49.9  [0603]  93.93,95.43 90 top
R144  10  [0603]  95.93,95.43 90 top
R145  10k  [0603]  100.93,130.43 180 top
R146  510  [2010]  104.93,126.43 180 top
R147  10k  [0603]  109.93,134.43 270 top
R148  10k  [0603]  107.93,134.43 270 top
R149  10k  [0603]  85.93,117.43 0 top
R150  10k  [0603]  96.93,115.43 180 top
U1  EEPROM  [SO08]  25.81,7 270 top
U2  EEPROM  [SO08]  64.32,7 270 top
U3  W5500  [LQFP-48]  38.81,32 180 top
U4  3.3V  [SOT23-5]  42.81,15 0 top
U5  POE_PSU-DP990X  [DP990X]  16.81,28 90 top
U6  W5500  [LQFP-48]  77.32,32 180 top
U7  3.3V  [SOT23-5]  81.32,15 0 top
U8  POE_PSU-DP990X  [DP990X]  55.32,28 90 top
U9  EEPROM  [SO08]  102.82,7 270 top
U10  W5500  [LQFP-48]  115.82,32 180 top
U11  3.3V  [SOT23-5]  119.82,15 0 top
U12  POE_PSU-DP990X  [DP990X]  93.82,28 90 top
U13  EEPROM  [SO08]  25.91,134.43 90 top
U14  W5500  [LQFP-48]  12.91,109.43 0 top
U15  3.3V  [SOT23-5]  8.91,126.43 180 top
U16  POE_PSU-DP990X  [DP990X]  34.91,113.43 270 top
U17  EEPROM  [SO08]  64.42,134.43 90 top
U18  W5500  [LQFP-48]  51.42,109.43 0 top
U19  3.3V  [SOT23-5]  47.42,126.43 180 top
U20  POE_PSU-DP990X  [DP990X]  73.42,113.43 270 top
U21  EEPROM  [SO08]  102.93,134.43 90 top
U22  W5500  [LQFP-48]  89.93,109.43 0 top
U23  3.3V  [SOT23-5]  85.93,126.43 180 top
U24  POE_PSU-DP990X  [DP990X]  111.93,113.43 270 top
U$1  [ETHERNET0]  24.81,30 0 bottom
U$2  [#POE#0]  24.81,28 0 bottom
U$3  [#POWER_CARRIER#0]  24.81,20 0 bottom
U$4  [MICROMOD_LOGO_.35]  51.37,60 90 top
U$5  [#DUMMY_LOAD#0]  22.71,16 0 bottom
U$6  [#WP#0]  26.21,13 0 bottom
U$7  [PWR0]  44.06,6.1 90 top
U$8  [#ACT#0]  39.81,56.8 270 bottom
U$9  [#PWR#0]  40.81,10.3 270 bottom
U$10  [MICROMOD_LOGO_.35]  61.34,32.22 0 bottom
U$11  [#MEAS#3]  76.32,14.3 270 bottom
U$12  [#LNK#1]  36.81,57 270 bottom
U$13  [#PMODE#0]  38.81,36 0 bottom
U$14  [01]  38.71,34 0 bottom
U$15  [12]  38.71,32 0 bottom
U$16  [23]  38.71,30 0 bottom
U$17  [ETHERNET0]  37.81,56 90 top
U$18  [#POE#0]  39.81,56 90 top
U$19  [#POE#0]  13.81,48 0 bottom
U$20  [PWR0]  82.57,6.1 90 top
U$21  [#PWR#0]  79.32,10.3 270 bottom
U$22  [#PMODE#0]  77.32,36 0 bottom
U$23  [01]  77.22,34 0 bottom
U$24  [12]  77.22,32 0 bottom
U$25  [23]  77.22,30 0 bottom
U$26  [ETHERNET0]  76.32,56 90 top
U$27  [#POE#0]  78.32,56 90 top
U$28  [#MEAS#3]  37.81,14.3 270 bottom
U$29  [ETHERNET0]  63.32,30 0 bottom
U$30  [#POE#0]  63.32,28 0 bottom
U$31  [#POWER_CARRIER#0]  63.32,20 0 bottom
U$32  [#DUMMY_LOAD#0]  61.22,16 0 bottom
U$33  [#WP#0]  64.72,13 0 bottom
U$34  [#ACT#0]  78.32,56.8 270 bottom
U$35  [#LNK#1]  75.32,57 270 bottom
U$36  [#POE#0]  52.32,48 0 bottom
U$37  [MICROMOD_LOGO_.35]  22.83,32.22 0 bottom
U$38  [MICROMOD_LOGO_.35]  89.87,60 90 top
U$39  [MICROMOD_LOGO_.35]  99.84,32.22 0 bottom
U$40  [#MEAS#3]  114.82,14.3 270 bottom
U$41  [PWR0]  121.07,6.1 90 top
U$42  [#PWR#0]  117.82,10.3 270 bottom
U$43  [#PMODE#0]  115.82,36 0 bottom
U$44  [01]  115.72,34 0 bottom
U$45  [12]  115.72,32 0 bottom
U$46  [23]  115.72,30 0 bottom
U$47  [ETHERNET0]  114.82,56 90 top
U$48  [#POE#0]  116.82,56 90 top
U$49  [ETHERNET0]  101.82,30 0 bottom
U$50  [#POE#0]  101.82,28 0 bottom
U$51  [#POWER_CARRIER#0]  101.82,20 0 bottom
U$52  [#DUMMY_LOAD#0]  99.72,16 0 bottom
U$53  [#WP#0]  103.22,13 0 bottom
U$54  [#ACT#0]  116.82,56.8 270 bottom
U$55  [#LNK#1]  113.82,57 270 bottom
U$56  [#POE#0]  90.82,48 0 bottom
U$57  [MICROMOD_LOGO_.35]  38.86,81.43 270 top
U$58  [MICROMOD_LOGO_.35]  28.89,109.21 180 bottom
U$59  [#MEAS#3]  13.91,127.13 90 bottom
U$60  [PWR0]  7.66,135.33 270 top
U$61  [#PWR#0]  10.91,131.13 90 bottom
U$62  [#PMODE#0]  12.91,105.43 180 bottom
U$63  [MICROMOD_LOGO_.35]  12.86,60 90 top
U$64  [01]  13.01,107.43 180 bottom
U$65  [12]  13.01,109.43 180 bottom
U$66  [23]  13.01,111.43 180 bottom
U$67  [ETHERNET0]  13.91,85.43 270 top
U$68  [#POE#0]  11.91,85.43 270 top
U$69  [ETHERNET0]  26.91,111.43 180 bottom
U$70  [#POE#0]  26.91,113.43 180 bottom
U$71  [#POWER_CARRIER#0]  26.91,121.43 180 bottom
U$72  [#DUMMY_LOAD#0]  29.01,125.43 180 bottom
U$73  [#WP#0]  25.51,128.43 180 bottom
U$74  [#ACT#0]  11.91,84.63 90 bottom
U$75  [#LNK#1]  14.91,84.43 90 bottom
U$76  [#POE#0]  37.91,93.43 180 bottom
U$77  [MICROMOD_LOGO_.35]  77.37,81.43 270 top
U$78  [MICROMOD_LOGO_.35]  67.4,109.21 180 bottom
U$79  [#MEAS#3]  52.42,127.13 90 bottom
U$80  [PWR0]  46.17,135.33 270 top
U$81  [#PWR#0]  49.42,131.13 90 bottom
U$82  [#PMODE#0]  51.42,105.43 180 bottom
U$83  [01]  51.52,107.43 180 bottom
U$84  [12]  51.52,109.43 180 bottom
U$85  [23]  51.52,111.43 180 bottom
U$86  [ETHERNET0]  52.42,85.43 270 top
U$87  [#POE#0]  50.42,85.43 270 top
U$88  [ETHERNET0]  65.42,111.43 180 bottom
U$89  [#POE#0]  65.42,113.43 180 bottom
U$90  [#POWER_CARRIER#0]  65.42,121.43 180 bottom
U$91  [#DUMMY_LOAD#0]  67.52,125.43 180 bottom
U$92  [#WP#0]  64.02,128.43 180 bottom
U$93  [#ACT#0]  50.42,84.63 90 bottom
U$94  [#LNK#1]  53.42,84.43 90 bottom
U$95  [#POE#0]  76.42,93.43 180 bottom
U$96  [MICROMOD_LOGO_.35]  115.88,81.43 270 top
U$97  [MICROMOD_LOGO_.35]  105.91,109.21 180 bottom
U$98  [#MEAS#3]  90.93,127.13 90 bottom
U$99  [PWR0]  84.68,135.33 270 top
U$100  [#PWR#0]  87.93,131.13 90 bottom
U$101  [#PMODE#0]  89.93,105.43 180 bottom
U$102  [01]  90.03,107.43 180 bottom
U$103  [12]  90.03,109.43 180 bottom
U$104  [23]  90.03,111.43 180 bottom
U$105  [ETHERNET0]  90.93,85.43 270 top
U$106  [#POE#0]  88.93,85.43 270 top
U$107  [ETHERNET0]  103.93,111.43 180 bottom
U$108  [#POE#0]  103.93,113.43 180 bottom
U$109  [#POWER_CARRIER#0]  103.93,121.43 180 bottom
U$110  [#DUMMY_LOAD#0]  106.03,125.43 180 bottom
U$111  [#WP#0]  102.53,128.43 180 bottom
U$112  [#ACT#0]  88.93,84.63 90 bottom
U$113  [#LNK#1]  91.93,84.43 90 bottom
U$114  [#POE#0]  114.93,93.43 180 bottom
Y1  25MHz  [CRYSTAL-SMD-2.0X1.6MM]  36.71,24 180 top
Y2  25MHz  [CRYSTAL-SMD-2.0X1.6MM]  75.22,24 180 top
Y3  25MHz  [CRYSTAL-SMD-2.0X1.6MM]  113.72,24 180 top
Y4  25MHz  [CRYSTAL-SMD-2.0X1.6MM]  15.01,117.43 0 top
Y5  25MHz  [CRYSTAL-SMD-2.0X1.6MM]  53.52,117.43 0 top
Y6  25MHz  [CRYSTAL-SMD-2.0X1.6MM]  92.03,117.43 0 top

## Library data of the parts
C1 C3 C4 C28-C30 C54-C56 C80-C82 C106-C108 C132-C134 = SparkFun-Capacitors; PROD_ID: CAP-00810
C2 C10-C12 C14 C15 C34-C39 C60-C65 C86-C91 C112-C117 C138-C143 = SparkFun-Capacitors; PROD_ID: CAP-08604
C5 C6 C31 C32 C57 C58 C83 C84 C109 C110 C135 C136 = SparkFun-Capacitors; PROD_ID: CAP-11812
C7 C25 C26 C50-C52 C76-C78 C102-C104 C128-C130 C154-C156 = SparkFun-Capacitors; PROD_ID: CAP-14259
C8 C49 C75 C101 C127 C153 = SparkFun-Capacitors; PROD_ID: CAP-12547
C9 C16 C33 C40 C59 C66 C85 C92 C111 C118 C137 C144 = SparkFun-Capacitors; PROD_ID: CAP-11015
C13 C27 C53 C79 C105 C131 = SparkFun-Capacitors; PROD_ID: CAP-00868
C17 C20 C41 C44 C67 C70 C93 C96 C119 C122 C145 C148 = SparkFun-Capacitors; PROD_ID: CAP-00867
C18 C42 C68 C94 C120 C146 = SparkFun-Capacitors; PROD_ID: CAP-08280
C19 C43 C69 C95 C121 C147 = SparkFun-Capacitors; PROD_ID: CAP-16238
C21 C22 C45 C46 C71 C72 C97 C98 C123 C124 C149 C150 = SparkFun-Capacitors; PROD_ID: CAP-16239
C23 C47 C73 C99 C125 C151 = SparkFun-Capacitors; PROD_ID: CAP-07885
C24 C48 C74 C100 C126 C152 = SparkFun-Capacitors; PROD_ID: CAP-13930
D1 D3 D6 D8 D10 D12 = SparkFun-DiscreteSemi; PROD_ID: DIO-14072
D2 D4 D5 D7 D9 D11 = SparkFun-LED; PROD_ID: DIO-00819
E$1-E$4 FD1-FD24 LOGO1-LOGO18 = SparkFun-Aesthetics
E$5 E$6 = SparkFun-Retired
FB1-FB6 = SparkFun-Coils; PROD_ID: NDUC-12579
ISO1-ISO12 JP1-JP30 LED1-LED12 LOAD LOAD1-LOAD5 MEAS MEAS1-MEAS5 POE_LED POE_LED1-POE_LED5 = SparkFun-Jumpers
J1 J3 J5 J7 J9 J12 U5 U8 U12 U16 U20 U24 = Ethernet
J2 J4 J6 J8 J10 J11 = SparkFun-MicroMod-Function
L1-L6 = SparkFun-Coils; PROD_ID: NDUC-14234
Q1 Q3 Q6 Q8 Q10 Q12 = SparkFun-DiscreteSemi; PROD_ID: TRANS-00830
Q2 Q4 Q5 Q7 Q9 Q11 = SparkFun-DiscreteSemi; PROD_ID: TRANS-14388
R1 R28 R54 R79 R104 R129 = SparkFun-Resistors; PROD_ID: RES-07868
R2 R46 R71 R96 R121 R146 = SparkFun-Resistors; PROD_ID: RES-08717
R3 R5 R11 R25 R29 R31 R51 R55 R56 R76 R80 R81 R101 R105 R106 R126 R130 R131 = SparkFun-Resistors; PROD_ID: RES-07856
R4 R6 R7 R9 R10 R12 R22-R24 R26 R27 R30 R33-R35 R45 R47-R50 R52 R53 R58-R60 R70 R72-R75 R77 R78 R83-R85 R95 R97-R100 R102 R103 R108-R110 R120 R122-R125 R127 R128 R133-R135 R145 R147-R150 = SparkFun-Resistors; PROD_ID: RES-00824
R8 R32 R57 R82 R107 R132 = SparkFun-Resistors; PROD_ID: RES-16236
R13 R18-R20 R36 R41-R43 R61 R66-R68 R86 R91-R93 R111 R116-R118 R136 R141-R143 = SparkFun-Resistors; PROD_ID: RES-16237
R14-R17 R37-R40 R62-R65 R87-R90 R112-R115 R137-R140 = SparkFun-Resistors; PROD_ID: RES-08270
R21 R44 R69 R94 R119 R144 = SparkFun-Resistors; PROD_ID: RES-12581
U1 U2 U9 U13 U17 U21 = SparkFun-IC-Memory; PROD_ID: IC-14645
U3 U6 U10 U14 U18 U22 = SparkFun-IC-Comms; PROD_ID: IC-16240
U4 U7 U11 U15 U19 U23 = SparkFun-IC-Power; PROD_ID: VREG-12457
U$1-U$3 U$5-U$9 U$11-U$36 U$40-U$56 U$59-U$62 U$64-U$76 U$79-U$95 U$98-U$114 = output
U$4 U$10 U$37-U$39 U$57 U$58 U$63 U$77 U$78 U$96 U$97 = SparkFun-MicroMod
Y1-Y6 = SparkFun-Clocks; PROD_ID: XTAL-16235

## Nets
3.3V: C1.1 C4.1 C9.1 C24.1 FB2.1 R3.2 R4.2 R5.2 R9.2 R10.2 R12.2 R22.1 R23.2 R24.2 U1.8 U3.28 U4.5
3.3V1: C28.1 C30.1 C33.1 C48.1 FB1.1 R29.2 R31.2 R33.2 R34.2 R35.2 R45.1 R47.2 R48.2 R49.2 U2.8 U6.28 U7.5
3.3V2: C54.1 C56.1 C59.1 C74.1 FB3.1 R55.2 R56.2 R58.2 R59.2 R60.2 R70.1 R72.2 R73.2 R74.2 U9.8 U10.28 U11.5
3.3V3: C80.1 C82.1 C85.1 C100.1 FB4.1 R80.2 R81.2 R83.2 R84.2 R85.2 R95.1 R97.2 R98.2 R99.2 U13.8 U14.28 U15.5
3.3V4: C106.1 C108.1 C111.1 C126.1 FB5.1 R105.2 R106.2 R108.2 R109.2 R110.2 R120.1 R122.2 R123.2 R124.2 U17.8 U18.28 U19.5
3.3V5: C132.1 C134.1 C137.1 C152.1 FB6.1 R130.2 R131.2 R133.2 R134.2 R135.2 R145.1 R147.2 R148.2 R149.2 U21.8 U22.28 U23.5
3.3V_IN: J11.73 R6.1
3.3V_IN1: J2.73 R26.1
3.3V_IN2: J4.73 R52.1
3.3V_IN3: J6.73 R77.1
3.3V_IN4: J8.73 R102.1
3.3V_IN5: J10.73 R127.1
5V: C3.1 C13.1 MEAS.2 MEAS.4 U4.1
5V1: C27.1 C29.1 MEAS1.2 MEAS1.4 U7.1
5V2: C53.1 C55.1 MEAS2.2 MEAS2.4 U11.1
5V3: C79.1 C81.1 MEAS3.2 MEAS3.4 U15.1
5V4: C105.1 C107.1 MEAS4.2 MEAS4.4 U19.1
5V5: C131.1 C133.1 MEAS5.2 MEAS5.4 U23.1
5V_FILTER: C26.1 D1.A L1.2 LOAD.2 POE_LED.2
5V_FILTER1: C52.1 D3.A L2.2 LOAD1.2 POE_LED1.2
5V_FILTER2: C78.1 D6.A L3.2 LOAD2.2 POE_LED2.2
5V_FILTER3: C104.1 D8.A L4.2 LOAD3.2 POE_LED3.2
5V_FILTER4: C130.1 D10.A L5.2 LOAD4.2 POE_LED4.2
5V_FILTER5: C156.1 D12.A L6.2 LOAD5.2 POE_LED5.2
5V_RAW: C7.1 C8.+ C25.1 L1.1 U5.1 U5.2
5V_RAW1: C49.+ C50.1 C51.1 L2.1 U8.1 U8.2
5V_RAW2: C75.+ C76.1 C77.1 L3.1 U12.1 U12.2
5V_RAW3: C101.+ C102.1 C103.1 L4.1 U16.1 U16.2
5V_RAW4: C127.+ C128.1 C129.1 L5.1 U20.1 U20.2
5V_RAW5: C153.+ C154.1 C155.1 L6.1 U24.1 U24.2
A0: J11.36 U1.1
A1: J11.34 U1.2
A2: J11.32 U1.3
A3: J2.36 U2.1
A4: J2.32 U2.3
A5: J2.34 U2.2
A6: J4.36 U9.1
A7: J4.32 U9.3
A8: J4.34 U9.2
A9: J6.36 U13.1
A10: J6.32 U13.3
A11: J6.34 U13.2
A12: J8.36 U17.1
A13: J8.32 U17.3
A14: J8.34 U17.2
A15: J10.36 U21.1
A16: J10.32 U21.3
A17: J10.34 U21.2
ACT_LED: LED2.2 U3.27
ACT_LED1: LED4.2 U6.27
ACT_LED2: LED6.2 U10.27
ACT_LED3: LED8.2 U14.27
ACT_LED4: LED10.2 U18.27
ACT_LED5: LED12.2 U22.27
ETH_!CS!: J11.49 R23.1 U3.32
ETH_!CS!1: J2.49 R48.1 U6.32
ETH_!CS!2: J4.49 R73.1 U10.32
ETH_!CS!3: J6.49 R98.1 U14.32
ETH_!CS!4: J8.49 R123.1 U18.32
ETH_!CS!5: J10.49 R148.1 U22.32
ETH_!INT!: J11.47 R4.1 U3.36
ETH_!INT!1: J2.47 R47.1 U6.36
ETH_!INT!2: J4.47 R72.1 U10.36
ETH_!INT!3: J6.47 R97.1 U14.36
ETH_!INT!4: J8.47 R122.1 U18.36
ETH_!INT!5: J10.47 R147.1 U22.36
ETH_!RST!: J11.51 R24.1 U3.37
ETH_!RST!1: J2.51 R49.1 U6.37
ETH_!RST!2: J4.51 R74.1 U10.37
ETH_!RST!3: J6.51 R99.1 U14.37
ETH_!RST!4: J8.51 R124.1 U18.37
ETH_!RST!5: J10.51 R149.1 U22.37
GND: C1.2 C2.2 C3.2 C4.2 C5.2 C6.2 C7.2 C8.- C9.2 C10.2 C11.2 C12.2 C13.2 C14.2 C15.2 C16.2 C17.2 C18.2 C19.2 C20.2 C23.2 C24.2 C25.2 C26.2 D5.C J11.1 J11.33 J11.39 J11.45 J11.75 J11.GND1 J11.GND2 J11.GND3 J11.GND4 J11.GND5 J11.GND6 JP1.1 JP2.1 JP3.1 JP5.1 Q1.2 R2.1 R8.1 R30.1 U1.4 U3.3 U3.9 U3.14 U3.16 U3.19 U3.29 U3.48 U4.2 U5.3
GND1: C27.2 C28.2 C29.2 C30.2 C31.2 C32.2 C33.2 C34.2 C35.2 C36.2 C37.2 C38.2 C39.2 C40.2 C41.2 C42.2 C43.2 C44.2 C47.2 C48.2 C49.- C50.2 C51.2 C52.2 D2.C J2.1 J2.33 J2.39 J2.45 J2.75 J2.GND1 J2.GND2 J2.GND3 J2.GND4 J2.GND5 J2.GND6 JP6.1 JP7.1 JP8.1 JP10.1 Q3.2 R32.1 R46.1 R50.1 U2.4 U6.3 U6.9 U6.14 U6.16 U6.19 U6.29 U6.48 U7.2 U8.3
GND2: C53.2 C54.2 C55.2 C56.2 C57.2 C58.2 C59.2 C60.2 C61.2 C62.2 C63.2 C64.2 C65.2 C66.2 C67.2 C68.2 C69.2 C70.2 C73.2 C74.2 C75.- C76.2 C77.2 C78.2 D4.C J4.1 J4.33 J4.39 J4.45 J4.75 J4.GND1 J4.GND2 J4.GND3 J4.GND4 J4.GND5 J4.GND6 JP11.1 JP12.1 JP13.1 JP15.1 Q6.2 R57.1 R71.1 R75.1 U9.4 U10.3 U10.9 U10.14 U10.16 U10.19 U10.29 U10.48 U11.2 U12.3
GND3: C79.2 C80.2 C81.2 C82.2 C83.2 C84.2 C85.2 C86.2 C87.2 C88.2 C89.2 C90.2 C91.2 C92.2 C93.2 C94.2 C95.2 C96.2 C99.2 C100.2 C101.- C102.2 C103.2 C104.2 D7.C J6.1 J6.33 J6.39 J6.45 J6.75 J6.GND1 J6.GND2 J6.GND3 J6.GND4 J6.GND5 J6.GND6 JP16.1 JP17.1 JP18.1 JP20.1 Q8.2 R82.1 R96.1 R100.1 U13.4 U14.3 U14.9 U14.14 U14.16 U14.19 U14.29 U14.48 U15.2 U16.3
GND4: C105.2 C106.2 C107.2 C108.2 C109.2 C110.2 C111.2 C112.2 C113.2 C114.2 C115.2 C116.2 C117.2 C118.2 C119.2 C120.2 C121.2 C122.2 C125.2 C126.2 C127.- C128.2 C129.2 C130.2 D9.C J8.1 J8.33 J8.39 J8.45 J8.75 J8.GND1 J8.GND2 J8.GND3 J8.GND4 J8.GND5 J8.GND6 JP21.1 JP22.1 JP23.1 JP25.1 Q10.2 R107.1 R121.1 R125.1 U17.4 U18.3 U18.9 U18.14 U18.16 U18.19 U18.29 U18.48 U19.2 U20.3
GND5: C131.2 C132.2 C133.2 C134.2 C135.2 C136.2 C137.2 C138.2 C139.2 C140.2 C141.2 C142.2 C143.2 C144.2 C145.2 C146.2 C147.2 C148.2 C151.2 C152.2 C153.- C154.2 C155.2 C156.2 D11.C J10.1 J10.33 J10.39 J10.45 J10.75 J10.GND1 J10.GND2 J10.GND3 J10.GND4 J10.GND5 J10.GND6 JP26.1 JP27.1 JP28.1 JP30.1 Q12.2 R132.1 R146.1 R150.1 U21.4 U22.3 U22.9 U22.14 U22.16 U22.19 U22.29 U22.48 U23.2 U24.3
GND-ISO: C19.1 J1.7 J1.8 J1.S1 J1.S2
GND-ISO1: C43.1 J3.7 J3.8 J3.S1 J3.S2
GND-ISO2: C69.1 J5.7 J5.8 J5.S1 J5.S2
GND-ISO3: C95.1 J7.7 J7.8 J7.S1 J7.S2
GND-ISO4: C121.1 J9.7 J9.8 J9.S1 J9.S2
GND-ISO5: C147.1 J12.7 J12.8 J12.S1 J12.S2
I2C_SCL: J11.21 U1.6
I2C_SCL1: J2.21 U2.6
I2C_SCL2: J4.21 U9.6
I2C_SCL3: J6.21 U13.6
I2C_SCL4: J8.21 U17.6
I2C_SCL5: J10.21 U21.6
I2C_SDA: J11.19 U1.5
I2C_SDA1: J2.19 U2.5
I2C_SDA2: J4.19 U9.5
I2C_SDA3: J6.19 U13.5
I2C_SDA4: J8.19 U17.5
I2C_SDA5: J10.19 U21.5
LINK_LED: LED1.2 U3.25
LINK_LED1: LED3.2 U6.25
LINK_LED2: LED5.2 U10.25
LINK_LED3: LED7.2 U14.25
LINK_LED4: LED9.2 U18.25
LINK_LED5: LED11.2 U22.25
N$1: C5.1 R1.1 U3.31 Y1.1
N$2: C6.1 R1.2 U3.30 Y1.3
N$3: J1.14 LED2.1
N$4: J1.12 LED1.1
N$5: D5.A R11.1
N$6: POE_LED.1 R11.2
N$7: D1.C JP4.1
N$8: J1.13 R5.1
N$9: LOAD.1 R2.2
N$10: J1.11 R3.1
N$11: Q1.3 Q5.1 R7.1
N$12: JP5.2 R22.2 U1.7
N$13: R8.2 U3.10
N$14: ISO1.2 ISO1.4 U5.5 U5.6
N$15: C17.1 U3.22
N$16: C18.1 U3.20
N$17: R30.2 U3.23
N$18: ISO2.2 ISO2.4 U5.7 U5.8
N$19: POE_LED1.1 R25.2
N$20: D2.A R25.1
N$21: Q2.1 Q3.3 R27.1
N$22: C31.1 R28.1 U6.31 Y2.1
N$23: C32.1 R28.2 U6.30 Y2.3
N$24: J3.13 R31.1
N$25: J3.11 R29.1
N$26: R32.2 U6.10
N$27: C41.1 U6.22
N$28: C42.1 U6.20
N$29: D3.C JP9.1
N$30: LOAD1.1 R46.2
N$31: ISO3.2 ISO3.4 U8.5 U8.6
N$32: ISO4.2 ISO4.4 U8.7 U8.8
N$33: JP10.2 R45.2 U2.7
N$34: J3.12 LED3.1
N$35: J3.14 LED4.1
N$36: R50.2 U6.23
N$37: POE_LED2.1 R51.2
N$38: D4.A R51.1
N$39: Q4.1 Q6.3 R53.1
N$40: C57.1 R54.1 U10.31 Y3.1
N$41: C58.1 R54.2 U10.30 Y3.3
N$42: J5.13 R56.1
N$43: J5.11 R55.1
N$44: R57.2 U10.10
N$45: C67.1 U10.22
N$46: C68.1 U10.20
N$47: D6.C JP14.1
N$48: LOAD2.1 R71.2
N$49: ISO5.2 ISO5.4 U12.5 U12.6
N$50: ISO6.2 ISO6.4 U12.7 U12.8
N$51: JP15.2 R70.2 U9.7
N$52: J5.12 LED5.1
N$53: J5.14 LED6.1
N$54: R75.2 U10.23
N$55: POE_LED3.1 R76.2
N$56: D7.A R76.1
N$57: Q7.1 Q8.3 R78.1
N$58: C83.1 R79.1 U14.31 Y4.1
N$59: C84.1 R79.2 U14.30 Y4.3
N$60: J7.13 R81.1
N$61: J7.11 R80.1
N$62: R82.2 U14.10
N$63: C93.1 U14.22
N$64: C94.1 U14.20
N$65: D8.C JP19.1
N$66: LOAD3.1 R96.2
N$67: ISO7.2 ISO7.4 U16.5 U16.6
N$68: ISO8.2 ISO8.4 U16.7 U16.8
N$69: JP20.2 R95.2 U13.7
N$70: J7.12 LED7.1
N$71: J7.14 LED8.1
N$72: R100.2 U14.23
N$73: POE_LED4.1 R101.2
N$74: D9.A R101.1
N$75: Q9.1 Q10.3 R103.1
N$76: C109.1 R104.1 U18.31 Y5.1
N$77: C110.1 R104.2 U18.30 Y5.3
N$78: J9.13 R106.1
N$79: J9.11 R105.1
N$80: R107.2 U18.10
N$81: C119.1 U18.22
N$82: C120.1 U18.20
N$83: D10.C JP24.1
N$84: LOAD4.1 R121.2
N$85: ISO9.2 ISO9.4 U20.5 U20.6
N$86: ISO10.2 ISO10.4 U20.7 U20.8
N$87: JP25.2 R120.2 U17.7
N$88: J9.12 LED9.1
N$89: J9.14 LED10.1
N$90: R125.2 U18.23
N$91: POE_LED5.1 R126.2
N$92: D11.A R126.1
N$93: Q11.1 Q12.3 R128.1
N$94: C135.1 R129.1 U22.31 Y6.1
N$95: C136.1 R129.2 U22.30 Y6.3
N$96: J12.13 R131.1
N$97: J12.11 R130.1
N$98: R132.2 U22.10
N$99: C145.1 U22.22
N$100: C146.1 U22.20
N$101: D12.C JP29.1
N$102: LOAD5.1 R146.2
N$103: ISO11.2 ISO11.4 U24.5 U24.6
N$104: ISO12.2 ISO12.4 U24.7 U24.8
N$105: JP30.2 R145.2 U21.7
N$106: J12.12 LED11.1
N$107: J12.14 LED12.1
N$108: R150.2 U22.23
PMODE0: JP1.2 R9.1 U3.45
PMODE1: JP2.2 R10.1 U3.44
PMODE2: JP3.2 R12.1 U3.43
PMODE3: JP6.2 R33.1 U6.45
PMODE4: JP7.2 R34.1 U6.44
PMODE5: JP8.2 R35.1 U6.43
PMODE6: JP11.2 R58.1 U10.45
PMODE7: JP12.2 R59.1 U10.44
PMODE8: JP13.2 R60.1 U10.43
PMODE9: JP16.2 R83.1 U14.45
PMODE10: JP17.2 R84.1 U14.44
PMODE11: JP18.2 R85.1 U14.43
PMODE12: JP21.2 R108.1 U18.45
PMODE13: JP22.2 R109.1 U18.44
PMODE14: JP23.2 R110.1 U18.43
PMODE15: JP26.2 R133.1 U22.45
PMODE16: JP27.2 R134.1 U22.44
PMODE17: JP28.2 R135.1 U22.43
PW+: ISO1.1 ISO1.3 J1.9
PW+1: ISO3.1 ISO3.3 J3.9
PW+2: ISO5.1 ISO5.3 J5.9
PW+3: ISO7.1 ISO7.3 J7.9
PW+4: ISO9.1 ISO9.3 J9.9
PW+5: ISO11.1 ISO11.3 J12.9
PW-: ISO2.1 ISO2.3 J1.10
PW-1: ISO4.1 ISO4.3 J3.10
PW-2: ISO6.1 ISO6.3 J5.10
PW-3: ISO8.1 ISO8.3 J7.10
PW-4: ISO10.1 ISO10.3 J9.10
PW-5: ISO12.1 ISO12.3 J12.10
PWR_EN: J11.71 Q1.1 R6.2 U4.3
PWR_EN1: J2.71 Q3.1 R26.2 U7.3
PWR_EN2: J4.71 Q6.1 R52.2 U11.3
PWR_EN3: J6.71 Q8.1 R77.2 U15.3
PWR_EN4: J8.71 Q10.1 R102.2 U19.3
PWR_EN5: J10.71 Q12.1 R127.2 U23.3
RCT: C20.1 J1.5 R13.1 R18.1
RCT1: C44.1 J3.5 R36.1 R41.1
RCT2: C70.1 J5.5 R61.1 R66.1
RCT3: C96.1 J7.5 R86.1 R91.1
RCT4: C122.1 J9.5 R111.1 R116.1
RCT5: C148.1 J12.5 R136.1 R141.1
RD+: C22.2 J1.3
RD+1: C46.2 J3.3
RD+2: C72.2 J5.3
RD+3: C98.2 J7.3
RD+4: C124.2 J9.3
RD+5: C150.2 J12.3
RD-: C21.2 J1.6
RD-1: C45.2 J3.6
RD-2: C71.2 J5.6
RD-3: C97.2 J7.6
RD-4: C123.2 J9.6
RD-5: C149.2 J12.6
RXN: R17.1 U3.5
RXN1: C21.1 R17.2 R18.2
RXN2: R40.1 U6.5
RXN3: C45.1 R40.2 R41.2
RXN4: R65.1 U10.5
RXN5: C71.1 R65.2 R66.2
RXN6: R90.1 U14.5
RXN7: C97.1 R90.2 R91.2
RXN8: R115.1 U18.5
RXN9: C123.1 R115.2 R116.2
RXN10: R140.1 U22.5
RXN11: C149.1 R140.2 R141.2
RXP: R16.1 U3.6
RXP1: C22.1 R13.2 R16.2
RXP2: R39.1 U6.6
RXP3: C46.1 R36.2 R39.2
RXP4: R64.1 U10.6
RXP5: C72.1 R61.2 R64.2
RXP6: R89.1 U14.6
RXP7: C98.1 R86.2 R89.2
RXP8: R114.1 U18.6
RXP9: C124.1 R111.2 R114.2
RXP10: R139.1 U22.6
RXP11: C150.1 R136.2 R139.2
SPI_CIPO: J11.7 U3.34
SPI_CIPO1: J2.7 U6.34
SPI_CIPO2: J4.7 U10.34
SPI_CIPO3: J6.7 U14.34
SPI_CIPO4: J8.7 U18.34
SPI_CIPO5: J10.7 U22.34
SPI_COPI: J11.5 U3.35
SPI_COPI1: J2.5 U6.35
SPI_COPI2: J4.5 U10.35
SPI_COPI3: J6.5 U14.35
SPI_COPI4: J8.5 U18.35
SPI_COPI5: J10.5 U22.35
SPI_SCK: J11.3 U3.33
SPI_SCK1: J2.3 U6.33
SPI_SCK2: J4.3 U10.33
SPI_SCK3: J6.3 U14.33
SPI_SCK4: J8.3 U18.33
SPI_SCK5: J10.3 U22.33
TCT: C23.1 J1.4 R21.1
TCT1: C47.1 J3.4 R44.1
TCT2: C73.1 J5.4 R69.1
TCT3: C99.1 J7.4 R94.1
TCT4: C125.1 J9.4 R119.1
TCT5: C151.1 J12.4 R144.1
TD+: J1.1 R14.2 R19.1
TD+1: J3.1 R37.2 R42.1
TD+2: J5.1 R62.2 R67.1
TD+3: J7.1 R87.2 R92.1
TD+4: J9.1 R112.2 R117.1
TD+5: J12.1 R137.2 R142.1
TD-: J1.2 R15.2 R20.1
TD-1: J3.2 R38.2 R43.1
TD-2: J5.2 R63.2 R68.1
TD-3: J7.2 R88.2 R93.1
TD-4: J9.2 R113.2 R118.1
TD-5: J12.2 R138.2 R143.1
TXN: R15.1 U3.1
TXN1: R38.1 U6.1
TXN2: R63.1 U10.1
TXN3: R88.1 U14.1
TXN4: R113.1 U18.1
TXN5: R138.1 U22.1
TXP: R14.1 U3.2
TXP1: R37.1 U6.2
TXP2: R62.1 U10.2
TXP3: R87.1 U14.2
TXP4: R112.1 U18.2
TXP5: R137.1 U22.2
VCC: MEAS.1 MEAS.3 Q5.3
VCC1: MEAS1.1 MEAS1.3 Q2.3
VCC2: MEAS2.1 MEAS2.3 Q4.3
VCC3: MEAS3.1 MEAS3.3 Q7.3
VCC4: MEAS4.1 MEAS4.3 Q9.3
VCC5: MEAS5.1 MEAS5.3 Q11.3
VCC_IN: J11.72 J11.74 JP4.2 Q5.2 R7.2
VCC_IN1: J2.72 J2.74 JP9.2 Q2.2 R27.2
VCC_IN2: J4.72 J4.74 JP14.2 Q4.2 R53.2
VCC_IN3: J6.72 J6.74 JP19.2 Q7.2 R78.2
VCC_IN4: J8.72 J8.74 JP24.2 Q9.2 R103.2
VCC_IN5: J10.72 J10.74 JP29.2 Q11.2 R128.2
VCCA: C2.1 C10.1 C11.1 C12.1 C14.1 C15.1 C16.1 FB2.2 R19.2 R20.2 R21.2 U3.4 U3.8 U3.11 U3.15 U3.17 U3.21
VCCA1: C34.1 C35.1 C36.1 C37.1 C38.1 C39.1 C40.1 FB1.2 R42.2 R43.2 R44.2 U6.4 U6.8 U6.11 U6.15 U6.17 U6.21
VCCA2: C60.1 C61.1 C62.1 C63.1 C64.1 C65.1 C66.1 FB3.2 R67.2 R68.2 R69.2 U10.4 U10.8 U10.11 U10.15 U10.17 U10.21
VCCA3: C86.1 C87.1 C88.1 C89.1 C90.1 C91.1 C92.1 FB4.2 R92.2 R93.2 R94.2 U14.4 U14.8 U14.11 U14.15 U14.17 U14.21
VCCA4: C112.1 C113.1 C114.1 C115.1 C116.1 C117.1 C118.1 FB5.2 R117.2 R118.2 R119.2 U18.4 U18.8 U18.11 U18.15 U18.17 U18.21
VCCA5: C138.1 C139.1 C140.1 C141.1 C142.1 C143.1 C144.1 FB6.2 R142.2 R143.2 R144.2 U22.4 U22.8 U22.11 U22.15 U22.17 U22.21

## Tracks (layer width: path | path; a pad name or v marks a point on that pad's centre or on a via)
3.3V  (via drill 0.3)
  Top 0.178: R5.2 R3.2 v40.81,58.5 | v41.81,41 R10.2 R12.2 | R9.2 v39.81,41 | C4.1 v25.86,11 R22.1 28.61,9.35 U1.8 | R4.2 R23.2 v20.81,9 | R24.2 41.96,22.01 41.95,22
  Top 0.254: U3.28 37.56,29.3 v37.85,29.59 | C24.1 41.95,22 41.95,20.01 C1.1 C9.1 41.86,17.9 U4.5 41.66,16.5 35.73,16.5 33.98,14.75 v31.68,14.75 | FB2.1 29.97,22 v29.77,22
  Bottom 0.178: v39.81,41 40.81,41 | 40.81,41 v41.81,41 | v40.81,58.5 40.81,41 | v20.81,9 21.81,9 23.81,11 v25.86,11
  Bottom 0.254: v29.77,22 29.77,24.14 33.82,28.19 36.45,28.19 v37.85,29.59 37.85,29.89 38.65,30.69 38.65,39.24 39.81,40.4 v39.81,41 | 25.86,14.5 25.86,15.25 25.11,16 25.11,18.3 28.81,22 v29.77,22 | 25.86,14.5 v25.86,11 | v31.68,14.75 31.44,14.5 25.86,14.5 | v29.77,22
3.3V1  (via drill 0.3)
  Top 0.178: R31.2 R29.2 v79.32,58.5 | v80.32,41 R34.2 R35.2 | R33.2 v78.32,41 | C30.1 v64.37,11 R45.1 67.12,9.35 U2.8 | R47.2 R48.2 v59.32,9 | R49.2 80.47,22.01 80.46,22
  Top 0.254: U6.28 76.07,29.3 v76.36,29.59 | C48.1 80.46,22 80.46,20.01 C28.1 C33.1 80.37,17.9 U7.5 80.17,16.5 74.24,16.5 72.49,14.75 v70.19,14.75 | FB1.1 68.48,22 v68.28,22
  Bottom 0.178: v78.32,41 79.32,41 | 79.32,41 v80.32,41 | v79.32,58.5 79.32,41 | v59.32,9 60.32,9 62.32,11 v64.37,11
  Bottom 0.254: v68.28,22 68.28,24.14 72.33,28.19 74.96,28.19 v76.36,29.59 76.36,29.89 77.16,30.69 77.16,39.24 78.32,40.4 v78.32,41 | 64.37,14.5 64.37,15.25 63.62,16 63.62,18.3 67.32,22 v68.28,22 | 64.37,14.5 v64.37,11 | v70.19,14.75 69.94,14.5 64.37,14.5 | v68.28,22
3.3V2  (via drill 0.3)
  Top 0.178: R56.2 R55.2 v117.82,58.5 | v118.82,41 R59.2 R60.2 | R58.2 v116.82,41 | C56.1 v102.87,11 R70.1 105.62,9.35 U9.8 | R72.2 R73.2 v97.82,9 | R74.2 118.97,22.01 118.96,22
  Top 0.254: U10.28 114.57,29.3 v114.87,29.59 | C74.1 118.96,22 C54.1 C59.1 118.87,17.9 U11.5 118.67,16.5 112.75,16.5 111,14.75 v108.7,14.75 | FB3.1 106.99,22 106.98,22 v106.78,22
  Bottom 0.178: v116.82,41 117.82,41 | 117.82,41 v118.82,41 | v117.82,58.5 117.82,41 | v97.82,9 98.82,9 100.82,11 v102.87,11
  Bottom 0.254: v106.78,22 106.78,24.14 110.84,28.19 113.47,28.19 v114.87,29.59 114.87,29.89 115.67,30.69 115.67,39.24 116.82,40.4 v116.82,41 | 102.87,14.5 102.87,15.25 102.12,16 102.12,18.3 105.83,22 v106.78,22 | 102.87,14.5 v102.87,11 | v108.7,14.75 108.45,14.5 102.87,14.5 | v106.78,22
3.3V3  (via drill 0.3)
  Top 0.178: R81.2 R80.2 v10.91,82.93 | v9.91,100.43 R84.2 R85.2 | R83.2 v11.91,100.43 | C82.1 v25.86,130.43 R95.1 23.11,132.08 U13.8 | R97.2 R98.2 v30.91,132.43 | R99.2 9.76,119.42 9.77,119.43
  Top 0.254: U14.28 14.16,112.13 v13.87,111.84 | C100.1 9.77,119.43 9.77,121.42 C80.1 C85.1 9.86,123.53 U15.5 10.06,124.93 15.98,124.93 17.73,126.68 v20.03,126.68 | FB4.1 21.75,119.43 v21.95,119.43
  Bottom 0.178: v11.91,100.43 10.91,100.43 | 10.91,100.43 v9.91,100.43 | v10.91,82.93 10.91,100.43 | v30.91,132.43 29.91,132.43 27.91,130.43 v25.86,130.43